# EAGLE board Dual_H-Bridge_Block-Panel-v10 (EAGLE 6.6.0), part 1 of 3
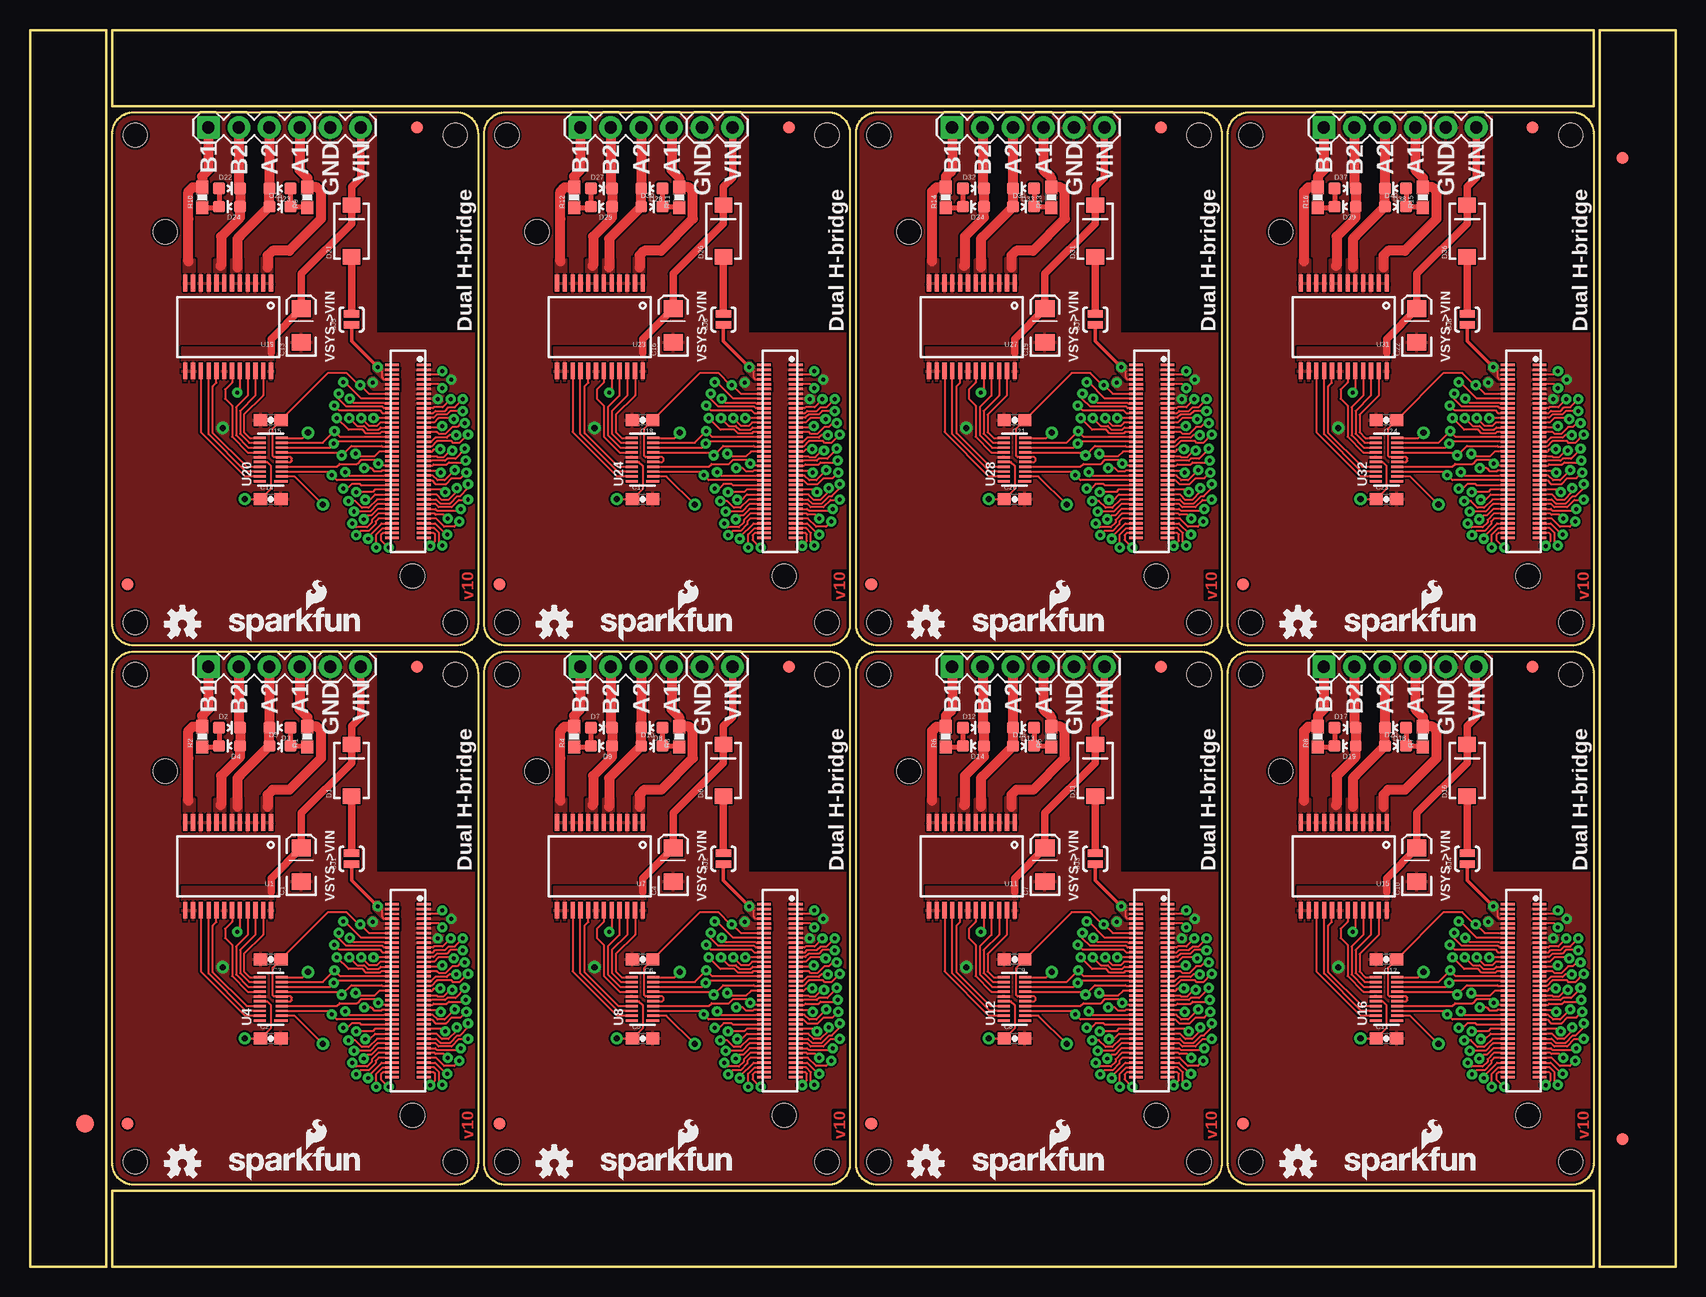
[diagram p0: board, top side]
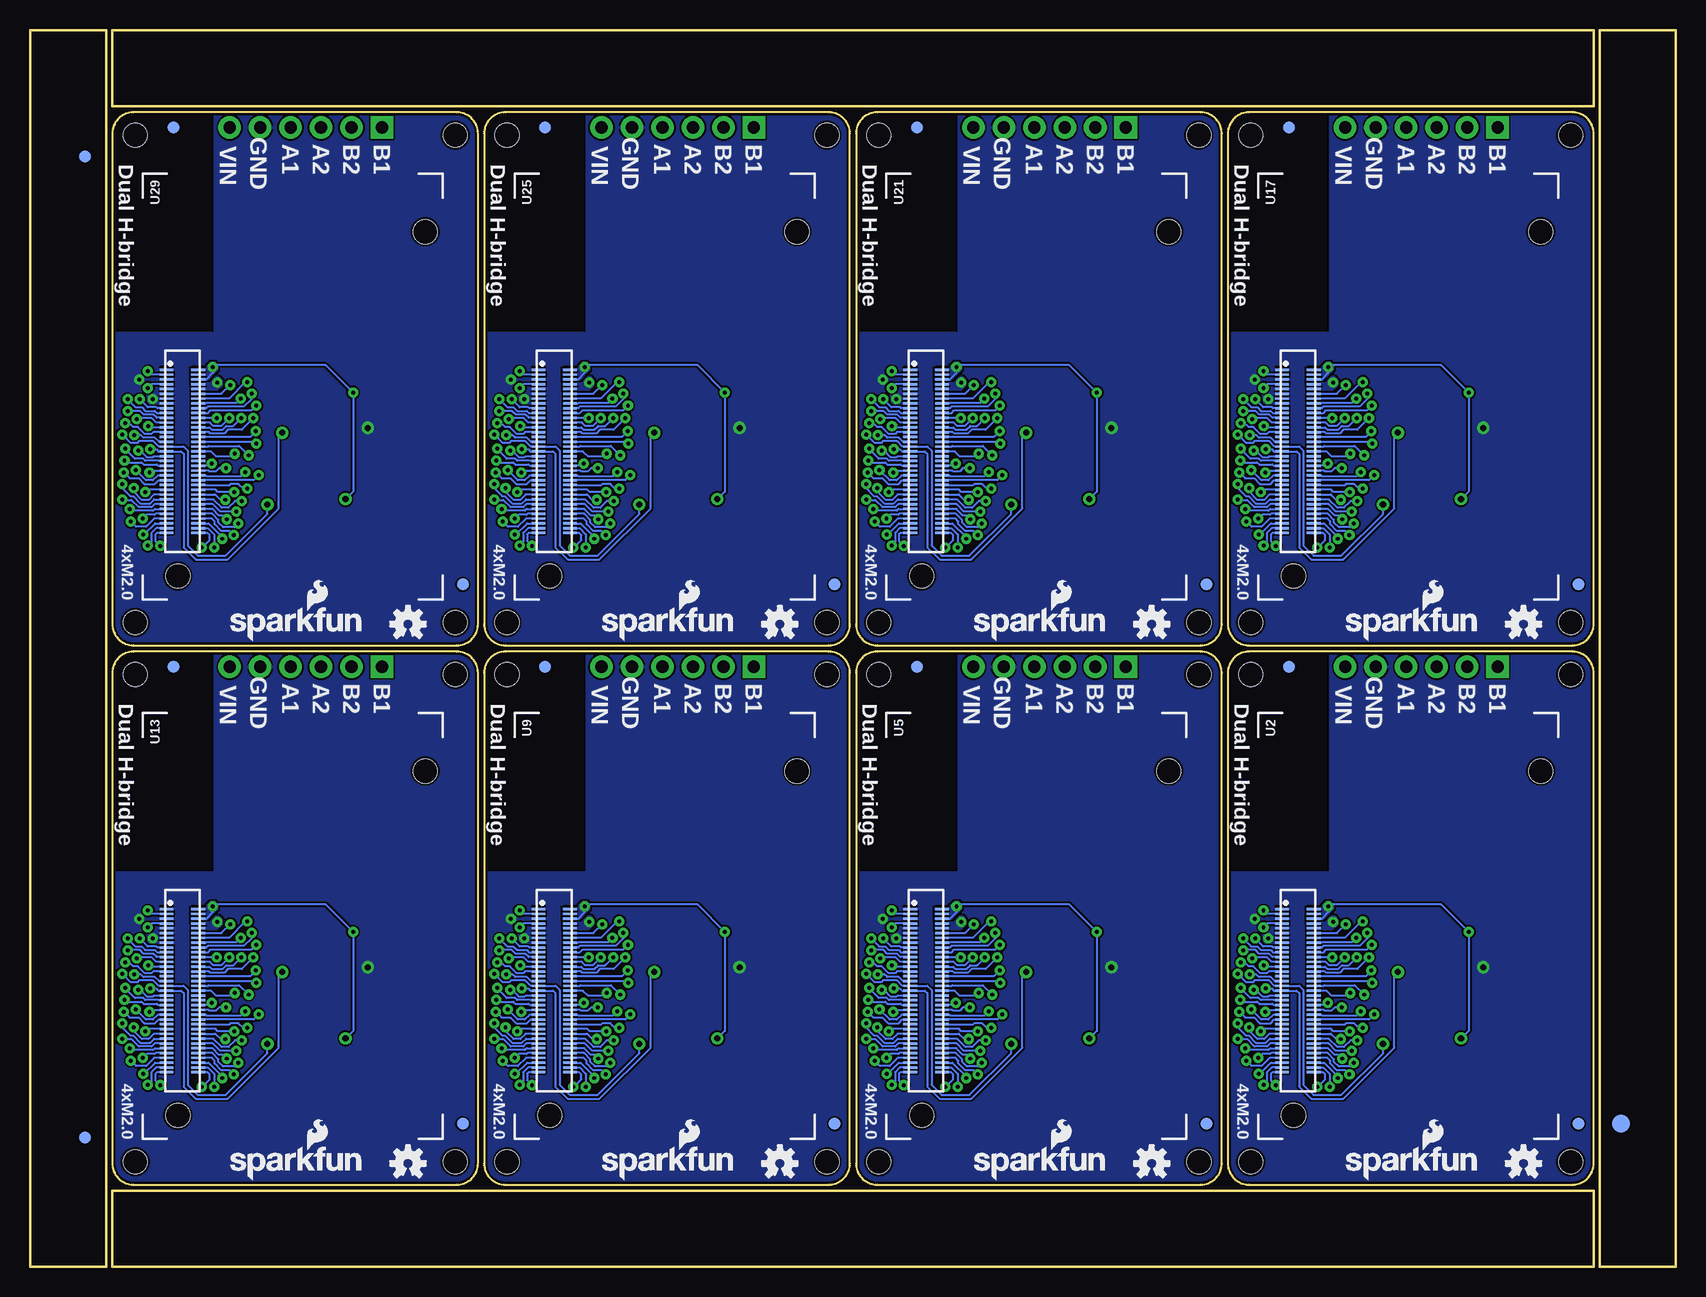
[diagram p1: board, bottom side, seen from below]

Size 137.16 x 103.12 mm. Coordinates in mm from the lower left corner, seen from the top.
Outline: 6.35,79.25 6.35,0 0,0 0,29.72
Outline: 137.16,79.25 137.16,0 130.81,0 130.81,29.72
Outline: 130.81,23.88 130.81,103.12 137.16,103.12 137.16,73.41
Outline: 0,23.88 0,103.12 6.35,103.12 6.35,73.41
Outline: 37.34,49.53 37.34,8.64 arc-90 35.56,6.86 8.64,6.86 arc-90 6.86,8.64 6.86,49.53 arc-90 8.64,51.31 35.56,51.31 arc-90 37.34,49.53
Outline: 68.33,49.53 68.33,8.64 arc-90 66.55,6.86 39.62,6.86 arc-90 37.85,8.64 37.85,49.53 arc-90 39.62,51.31 66.55,51.31 arc-90 68.33,49.53
Outline: 99.31,49.53 99.31,8.64 arc-90 97.54,6.86 70.61,6.86 arc-90 68.83,8.64 68.83,49.53 arc-90 70.61,51.31 97.54,51.31 arc-90 99.31,49.53
Outline: 130.3,49.53 130.3,8.64 arc-90 128.52,6.86 101.6,6.86 arc-90 99.82,8.64 99.82,49.53 arc-90 101.6,51.31 128.52,51.31 arc-90 130.3,49.53
Outline: 37.34,94.49 37.34,53.59 arc-90 35.56,51.82 8.64,51.82 arc-90 6.86,53.59 6.86,94.49 arc-90 8.64,96.27 35.56,96.27 arc-90 37.34,94.49
Outline: 68.33,94.49 68.33,53.59 arc-90 66.55,51.82 39.62,51.82 arc-90 37.85,53.59 37.85,94.49 arc-90 39.62,96.27 66.55,96.27 arc-90 68.33,94.49
Outline: 99.31,94.49 99.31,53.59 arc-90 97.54,51.82 70.61,51.82 arc-90 68.83,53.59 68.83,94.49 arc-90 70.61,96.27 97.54,96.27 arc-90 99.31,94.49
Outline: 130.3,94.49 130.3,53.59 arc-90 128.52,51.82 101.6,51.82 arc-90 99.82,53.59 99.82,94.49 arc-90 101.6,96.27 128.52,96.27 arc-90 130.3,94.49
Outline: 6.86,0 130.3,0 130.3,6.35 6.86,6.35 6.86,0
Outline: 130.3,103.12 6.86,103.12 6.86,96.77 130.3,96.77 130.3,103.12
Copper layers (1*16): Top 0.035mm / dielectric 1.5mm / Bottom 0.035mm
Design rules "SparkFun-2-layer *": minimum track width 6mil, minimum drill 13mil, track to track 6mil, track to pad 6mil, pad to pad 6mil, via to via 6mil, smd to smd 6mil, copper to edge 8mil, drill to drill 8mil, minimum pad ring 12mil, minimum via ring 10mil, stop-mask expansion 4mil, vias tented up to drill 20mil, thermal gap 6mil
Holes 2 mm at 35.43,8.76 8.76,8.76 8.76,49.4 35.43,49.4 66.42,8.76 39.75,8.76 39.75,49.4 66.42,49.4 97.41,8.76 70.74,8.76 70.74,49.4 97.41,49.4 128.4,8.76 101.73,8.76 101.73,49.4 128.4,49.4 35.43,53.72 8.76,53.72 8.76,94.36 35.43,94.36 66.42,53.72 39.75,53.72 39.75,94.36 66.42,94.36 97.41,53.72 70.74,53.72 70.74,94.36 97.41,94.36 128.4,53.72 101.73,53.72 101.73,94.36 128.4,94.36
tRestrict: area 29,33 to 37.3,51.3; area 59.9,33 to 68.3,51.3; area 90.9,33 to 99.3,51.3; area 121.9,33 to 130.3,51.3; area 29,78 to 37.3,96.3; area 59.9,78 to 68.3,96.3; area 90.9,78 to 99.3,96.3; area 121.9,78 to 130.3,96.3
bRestrict: area 29,33 to 37.3,51.3; area 59.9,33 to 68.3,51.3; area 90.9,33 to 99.3,51.3; area 121.9,33 to 130.3,51.3; area 29,78 to 37.3,96.3; area 59.9,78 to 68.3,96.3; area 90.9,78 to 99.3,96.3; area 121.9,78 to 130.3,96.3; 16 lines

## Footprints (pad centres in the part's own frame; a part is rotated, then mirrored left to right if it is on the bottom)
EIA3216 = smd 1.4 x 1.6: A 1.4,0; C -1.4,0
0603-CAP = smd 1.1 x 1: 1 -0.85,0; 2 0.85,0
SMA-DIODE = smd 1.27 x 1.47: A -2.15,0; C 2.15,0
LED-0603 = smd 1 x 1: A 0,-0.877; C 0,0.877
FIDUCIAL-1.5X3 = smd 1.5 x 1.5: 1 0,0
FIDUCIAL-1X2 = smd 1 x 1: 1 0,0
1X04 = drill 1.016 pad 1.88 square: 1 0,0 | drill 1.016 pad 1.88: 2 2.54,0; 3 5.08,0; 4 7.62,0
1X02 = drill 1.016 pad 1.88: 1 0,0; 2 2.54,0
0603-RES = smd 1.1 x 1: 1 -0.85,0; 2 0.85,0
PAD-JUMPER-2-NO_YES_SILK = smd 0.635 x 1.27: 1 -0.45,0; 2 0.45,0
SSOP24 = smd 0.348 x 1.397: 1 -3.575,-3.656; 2 -2.925,-3.656; 3 -2.275,-3.656; 4 -1.625,-3.656; 5 -0.975,-3.656; 6 -0.325,-3.656; 7 0.325,-3.656; 8 0.975,-3.656; 9 1.625,-3.656; 10 2.275,-3.656; 11 2.925,-3.656; 12 3.575,-3.656; 13 3.575,3.656; 14 2.925,3.656; 15 2.275,3.656; 16 1.625,3.656; 17 0.975,3.656; 18 0.325,3.656; 19 -0.325,3.656; 20 -0.975,3.656; 21 -1.625,3.656; 22 -2.275,3.656; 23 -2.925,3.656; 24 -3.575,3.656
EDISON_DAUGHTER = smd 1.14 x 0.2: 1 1.98,19.17; 2 4.62,19.17; 3 1.98,18.77; 4 4.62,18.77; 5 1.98,18.37; 6 4.62,18.37; 7 1.98,17.97; 8 4.62,17.97; 9 1.98,17.57; 10 4.62,17.57; 11 1.98,17.17; 12 4.62,17.17; 13 1.98,16.77; 14 4.62,16.77; 15 1.98,16.37; 16 4.62,16.37; 17 1.98,15.97; 18 4.62,15.97; 19 1.98,15.57; 20 4.62,15.57; 21 1.98,15.17; 22 4.62,15.17; 23 1.98,14.77; 24 4.62,14.77; 25 1.98,14.37; 26 4.62,14.37; 27 1.98,13.97; 28 4.62,13.97; 29 1.98,13.57; 30 4.62,13.57; 31 1.98,13.17; 32 4.62,13.17; 33 1.98,12.77; 34 4.62,12.77; 35 1.98,12.37; 36 4.62,12.37; 37 1.98,11.97; 38 4.62,11.97; 39 1.98,11.57; 40 4.62,11.57; 41 1.98,11.17; 42 4.62,11.17; 43 1.98,10.77; 44 4.62,10.77; 45 1.98,10.37; 46 4.62,10.37; 47 1.98,9.97; 48 4.62,9.97; 49 1.98,9.57; 50 4.62,9.57; 51 1.98,9.17; 52 4.62,9.17; 53 1.98,8.77; 54 4.62,8.77; 55 1.98,8.37; 56 4.62,8.37; 57 1.98,7.97; 58 4.62,7.97; 59 1.98,7.57; 60 4.62,7.57; 61 1.98,7.17; 62 4.62,7.17; 63 1.98,6.77; 64 4.62,6.77; 65 1.98,6.37; 66 4.62,6.37; 67 1.98,5.97; 68 4.62,5.97; 69 1.98,5.57; 70 4.62,5.57 | hole 2: 23.53,30.67; 2.93,1.98
DF40C-70DP-0.4(51) = smd 0.2 x 1.14 bottom: 1 6.8,1.32; 2 6.8,-1.32; 3 6.4,1.32; 4 6.4,-1.32; 5 6,1.32; 6 6,-1.32; 7 5.6,1.32; 8 5.6,-1.32; 9 5.2,1.32; 10 5.2,-1.32; 11 4.8,1.32; 12 4.8,-1.32; 13 4.4,1.32; 14 4.4,-1.32; 15 4,1.32; 16 4,-1.32; 17 3.6,1.32; 18 3.6,-1.32; 19 3.2,1.32; 20 3.2,-1.32; 21 2.8,1.32; 22 2.8,-1.32; 23 2.4,1.32; 24 2.4,-1.32; 25 2,1.32; 26 2,-1.32; 27 1.6,1.32; 28 1.6,-1.32; 29 1.2,1.32; 30 1.2,-1.32; 31 0.8,1.32; 32 0.8,-1.32; 33 0.4,1.32; 34 0.4,-1.32; 35 0,1.32; 36 0,-1.32; 37 -0.4,1.32; 38 -0.4,-1.32; 39 -0.8,1.32; 40 -0.8,-1.32; 41 -1.2,1.32; 42 -1.2,-1.32; 43 -1.6,1.32; 44 -1.6,-1.32; 45 -2,1.32; 46 -2,-1.32; 47 -2.4,1.32; 48 -2.4,-1.32; 49 -2.8,1.32; 50 -2.8,-1.32; 51 -3.2,1.32; 52 -3.2,-1.32; 53 -3.6,1.32; 54 -3.6,-1.32; 55 -4,1.32; 56 -4,-1.32; 57 -4.4,1.32; 58 -4.4,-1.32; 59 -4.8,1.32; 60 -4.8,-1.32; 61 -5.2,1.32; 62 -5.2,-1.32; 63 -5.6,1.32; 64 -5.6,-1.32; 65 -6,1.32; 66 -6,-1.32; 67 -6.4,1.32; 68 -6.4,-1.32; 69 -6.8,1.32; 70 -6.8,-1.32; NC1 7.2,1.32; NC2 7.2,-1.32; NC3 -7.2,-1.32; NC4 -7.2,1.32
UFDFN-20 = smd 0.2 x 1.1: 1 -1.8,-0.85 | smd 0.2 x 1: 2 -1.4,-0.9; 3 -1,-0.9; 4 -0.6,-0.9; 5 -0.2,-0.9; 6 0.2,-0.9; 7 0.6,-0.9; 8 1,-0.9; 9 1.4,-0.9; 10 1.8,-0.9; 11 1.8,0.9; 12 1.4,0.9; 13 1,0.9; 14 0.6,0.9; 15 0.2,0.9; 16 -0.2,0.9; 17 -0.6,0.9; 18 -1,0.9; 19 -1.4,0.9; 20 -1.8,0.9

## Placement (x,y rotation side)
C1  10uF  [EIA3216]  22.61,33.53 90 top
C2  0.1uF  [0603-CAP]  20.07,19.05 0 top
C3  0.1uF  [0603-CAP]  20.07,25.65 180 top
C4  10uF  [EIA3216]  53.59,33.53 90 top
C5  0.1uF  [0603-CAP]  51.05,19.05 0 top
C6  0.1uF  [0603-CAP]  51.05,25.65 180 top
C7  10uF  [EIA3216]  84.58,33.53 90 top
C8  0.1uF  [0603-CAP]  82.04,19.05 0 top
C9  0.1uF  [0603-CAP]  82.04,25.65 180 top
C10  10uF  [EIA3216]  115.57,33.53 90 top
C11  0.1uF  [0603-CAP]  113.03,19.05 0 top
C12  0.1uF  [0603-CAP]  113.03,25.65 180 top
C13  10uF  [EIA3216]  22.61,78.49 90 top
C14  0.1uF  [0603-CAP]  20.07,64.01 0 top
C15  0.1uF  [0603-CAP]  20.07,70.61 180 top
C16  10uF  [EIA3216]  53.59,78.49 90 top
C17  0.1uF  [0603-CAP]  51.05,64.01 0 top
C18  0.1uF  [0603-CAP]  51.05,70.61 180 top
C19  10uF  [EIA3216]  84.58,78.49 90 top
C20  0.1uF  [0603-CAP]  82.04,64.01 0 top
C21  0.1uF  [0603-CAP]  82.04,70.61 180 top
C22  10uF  [EIA3216]  115.57,78.49 90 top
C23  0.1uF  [0603-CAP]  113.03,64.01 0 top
C24  0.1uF  [0603-CAP]  113.03,70.61 180 top
D1  MBRA140  [SMA-DIODE]  26.8,41.4 90 top
D2  GREEN  [LED-0603]  16.64,44.96 270 top
D3  GREEN  [LED-0603]  20.83,44.96 90 top
D4  RED  [LED-0603]  16.64,43.43 90 top
D5  RED  [LED-0603]  20.83,43.43 270 top
D6  MBRA140  [SMA-DIODE]  57.78,41.4 90 top
D7  GREEN  [LED-0603]  47.62,44.96 270 top
D8  GREEN  [LED-0603]  51.82,44.96 90 top
D9  RED  [LED-0603]  47.62,43.43 90 top
D10  RED  [LED-0603]  51.82,43.43 270 top
D11  MBRA140  [SMA-DIODE]  88.77,41.4 90 top
D12  GREEN  [LED-0603]  78.61,44.96 270 top
D13  GREEN  [LED-0603]  82.8,44.96 90 top
D14  RED  [LED-0603]  78.61,43.43 90 top
D15  RED  [LED-0603]  82.8,43.43 270 top
D16  MBRA140  [SMA-DIODE]  119.76,41.4 90 top
D17  GREEN  [LED-0603]  109.6,44.96 270 top
D18  GREEN  [LED-0603]  113.79,44.96 90 top
D19  RED  [LED-0603]  109.6,43.43 90 top
D20  RED  [LED-0603]  113.79,43.43 270 top
D21  MBRA140  [SMA-DIODE]  26.8,86.36 90 top
D22  GREEN  [LED-0603]  16.64,89.92 270 top
D23  GREEN  [LED-0603]  20.83,89.92 90 top
D24  RED  [LED-0603]  16.64,88.39 90 top
D25  RED  [LED-0603]  20.83,88.39 270 top
D26  MBRA140  [SMA-DIODE]  57.78,86.36 90 top
D27  GREEN  [LED-0603]  47.62,89.92 270 top
D28  GREEN  [LED-0603]  51.82,89.92 90 top
D29  RED  [LED-0603]  47.62,88.39 90 top
D30  RED  [LED-0603]  51.82,88.39 270 top
D31  MBRA140  [SMA-DIODE]  88.77,86.36 90 top
D32  GREEN  [LED-0603]  78.61,89.92 270 top
D33  GREEN  [LED-0603]  82.8,89.92 90 top
D34  RED  [LED-0603]  78.61,88.39 90 top
D35  RED  [LED-0603]  82.8,88.39 270 top
D36  MBRA140  [SMA-DIODE]  119.76,86.36 90 top
D37  GREEN  [LED-0603]  109.6,89.92 270 top
D38  GREEN  [LED-0603]  113.79,89.92 90 top
D39  RED  [LED-0603]  109.6,88.39 90 top
D40  RED  [LED-0603]  113.79,88.39 270 top
E$1  [FIDUCIAL-1.5X3]  4.57,11.94 0 top
E$2  [FIDUCIAL-1.5X3]  4.57,11.94 0 bottom
E$3  [FIDUCIAL-1X2]  132.59,10.79 90 bottom
E$4  [FIDUCIAL-1X2]  132.72,10.67 0 top
E$5  [FIDUCIAL-1X2]  132.72,92.46 180 top
E$6  [FIDUCIAL-1X2]  132.59,92.58 90 bottom
FID1  FIDUCIAL1X2  [FIDUCIAL-1X2]  8.13,11.94 0 top
FID2  FIDUCIAL1X2  [FIDUCIAL-1X2]  32.26,50.04 0 top
FID3  FIDUCIAL1X2  [FIDUCIAL-1X2]  8.13,11.94 0 bottom
FID4  FIDUCIAL1X2  [FIDUCIAL-1X2]  32.26,50.04 0 bottom
FID5  FIDUCIAL1X2  [FIDUCIAL-1X2]  39.12,11.94 0 top
FID6  FIDUCIAL1X2  [FIDUCIAL-1X2]  63.25,50.04 0 top
FID7  FIDUCIAL1X2  [FIDUCIAL-1X2]  39.12,11.94 0 bottom
FID8  FIDUCIAL1X2  [FIDUCIAL-1X2]  63.25,50.04 0 bottom
FID9  FIDUCIAL1X2  [FIDUCIAL-1X2]  70.1,11.94 0 top
FID10  FIDUCIAL1X2  [FIDUCIAL-1X2]  94.23,50.04 0 top
FID11  FIDUCIAL1X2  [FIDUCIAL-1X2]  70.1,11.94 0 bottom
FID12  FIDUCIAL1X2  [FIDUCIAL-1X2]  94.23,50.04 0 bottom
FID13  FIDUCIAL1X2  [FIDUCIAL-1X2]  101.09,11.94 0 top
FID14  FIDUCIAL1X2  [FIDUCIAL-1X2]  125.22,50.04 0 top
FID15  FIDUCIAL1X2  [FIDUCIAL-1X2]  101.09,11.94 0 bottom
FID16  FIDUCIAL1X2  [FIDUCIAL-1X2]  125.22,50.04 0 bottom
FID17  FIDUCIAL1X2  [FIDUCIAL-1X2]  8.13,56.9 0 top
FID18  FIDUCIAL1X2  [FIDUCIAL-1X2]  32.26,95 0 top
FID19  FIDUCIAL1X2  [FIDUCIAL-1X2]  8.13,56.9 0 bottom
FID20  FIDUCIAL1X2  [FIDUCIAL-1X2]  32.26,95 0 bottom
FID21  FIDUCIAL1X2  [FIDUCIAL-1X2]  39.12,56.9 0 top
FID22  FIDUCIAL1X2  [FIDUCIAL-1X2]  63.25,95 0 top
FID23  FIDUCIAL1X2  [FIDUCIAL-1X2]  39.12,56.9 0 bottom
FID24  FIDUCIAL1X2  [FIDUCIAL-1X2]  63.25,95 0 bottom
FID25  FIDUCIAL1X2  [FIDUCIAL-1X2]  70.1,56.9 0 top
FID26  FIDUCIAL1X2  [FIDUCIAL-1X2]  94.23,95 0 top
FID27  FIDUCIAL1X2  [FIDUCIAL-1X2]  70.1,56.9 0 bottom
FID28  FIDUCIAL1X2  [FIDUCIAL-1X2]  94.23,95 0 bottom
FID29  FIDUCIAL1X2  [FIDUCIAL-1X2]  101.09,56.9 0 top
FID30  FIDUCIAL1X2  [FIDUCIAL-1X2]  125.22,95 0 top
FID31  FIDUCIAL1X2  [FIDUCIAL-1X2]  101.09,56.9 0 bottom
FID32  FIDUCIAL1X2  [FIDUCIAL-1X2]  125.22,95 0 bottom
JP1  [1X04]  14.86,50.04 0 top
JP2  M02PTH  [1X02]  25.02,50.04 0 top
JP3  [1X04]  45.85,50.04 0 top
JP4  M02PTH  [1X02]  56.01,50.04 0 top
JP5  [1X04]  76.83,50.04 0 top
JP6  M02PTH  [1X02]  87,50.04 0 top
JP7  [1X04]  107.82,50.04 0 top
JP8  M02PTH  [1X02]  117.98,50.04 0 top
JP9  [1X04]  14.86,95 0 top
JP10  M02PTH  [1X02]  25.02,95 0 top
JP11  [1X04]  45.85,95 0 top
JP12  M02PTH  [1X02]  56.01,95 0 top
JP13  [1X04]  76.83,95 0 top
JP14  M02PTH  [1X02]  87,95 0 top
JP15  [1X04]  107.82,95 0 top
JP16  M02PTH  [1X02]  117.98,95 0 top
LOGO1  OSHW-LOGOS  [OSHW-LOGO-S]  12.7,8.64 0 top
LOGO2  OSHW-LOGOS  [OSHW-LOGO-S]  12.7,8.64 0 bottom
LOGO3  SFE_LOGO_NAME_FLAME.1_INCH  [SFE_LOGO_NAME_FLAME_.1]  27.94,7.11 0 bottom
LOGO4  SFE_LOGO_NAME_FLAME.1_INCH  [SFE_LOGO_NAME_FLAME_.1]  16.15,7.11 0 top
LOGO5  OSHW-LOGOS  [OSHW-LOGO-S]  43.69,8.64 0 bottom
LOGO6  SFE_LOGO_NAME_FLAME.1_INCH  [SFE_LOGO_NAME_FLAME_.1]  58.93,7.11 0 bottom
LOGO7  OSHW-LOGOS  [OSHW-LOGO-S]  43.69,8.64 0 top
LOGO8  SFE_LOGO_NAME_FLAME.1_INCH  [SFE_LOGO_NAME_FLAME_.1]  47.14,7.11 0 top
LOGO9  OSHW-LOGOS  [OSHW-LOGO-S]  74.68,8.64 0 bottom
LOGO10  SFE_LOGO_NAME_FLAME.1_INCH  [SFE_LOGO_NAME_FLAME_.1]  89.92,7.11 0 bottom
LOGO11  OSHW-LOGOS  [OSHW-LOGO-S]  74.68,8.64 0 top
LOGO12  SFE_LOGO_NAME_FLAME.1_INCH  [SFE_LOGO_NAME_FLAME_.1]  78.13,7.11 0 top
LOGO13  OSHW-LOGOS  [OSHW-LOGO-S]  105.66,8.64 0 bottom
LOGO14  SFE_LOGO_NAME_FLAME.1_INCH  [SFE_LOGO_NAME_FLAME_.1]  120.9,7.11 0 bottom
LOGO15  OSHW-LOGOS  [OSHW-LOGO-S]  105.66,8.64 0 top
LOGO16  SFE_LOGO_NAME_FLAME.1_INCH  [SFE_LOGO_NAME_FLAME_.1]  109.12,7.11 0 top
LOGO17  OSHW-LOGOS  [OSHW-LOGO-S]  12.7,53.59 0 bottom
LOGO18  SFE_LOGO_NAME_FLAME.1_INCH  [SFE_LOGO_NAME_FLAME_.1]  27.94,52.07 0 bottom
LOGO19  OSHW-LOGOS  [OSHW-LOGO-S]  12.7,53.59 0 top
LOGO20  SFE_LOGO_NAME_FLAME.1_INCH  [SFE_LOGO_NAME_FLAME_.1]  16.15,52.07 0 top
LOGO21  OSHW-LOGOS  [OSHW-LOGO-S]  43.69,53.59 0 bottom
LOGO22  SFE_LOGO_NAME_FLAME.1_INCH  [SFE_LOGO_NAME_FLAME_.1]  58.93,52.07 0 bottom
LOGO23  OSHW-LOGOS  [OSHW-LOGO-S]  43.69,53.59 0 top
LOGO24  SFE_LOGO_NAME_FLAME.1_INCH  [SFE_LOGO_NAME_FLAME_.1]  47.14,52.07 0 top
LOGO25  OSHW-LOGOS  [OSHW-LOGO-S]  74.68,53.59 0 bottom
LOGO26  SFE_LOGO_NAME_FLAME.1_INCH  [SFE_LOGO_NAME_FLAME_.1]  89.92,52.07 0 bottom
LOGO27  OSHW-LOGOS  [OSHW-LOGO-S]  74.68,53.59 0 top
LOGO28  SFE_LOGO_NAME_FLAME.1_INCH  [SFE_LOGO_NAME_FLAME_.1]  78.13,52.07 0 top
LOGO29  OSHW-LOGOS  [OSHW-LOGO-S]  105.66,53.59 0 bottom
LOGO30  SFE_LOGO_NAME_FLAME.1_INCH  [SFE_LOGO_NAME_FLAME_.1]  120.9,52.07 0 bottom
LOGO31  OSHW-LOGOS  [OSHW-LOGO-S]  105.66,53.59 0 top
LOGO32  SFE_LOGO_NAME_FLAME.1_INCH  [SFE_LOGO_NAME_FLAME_.1]  109.12,52.07 0 top
R1  680  [0603-RES]  23.11,44.2 90 top
R2  680  [0603-RES]  14.35,44.2 90 top
R3  680  [0603-RES]  54.1,44.2 90 top
R4  680  [0603-RES]  45.34,44.2 90 top
R5  680  [0603-RES]  85.09,44.2 90 top
R6  680  [0603-RES]  76.33,44.2 90 top
R7  680  [0603-RES]  116.08,44.2 90 top
R8  680  [0603-RES]  107.31,44.2 90 top
R9  680  [0603-RES]  23.11,89.15 90 top
R10  680  [0603-RES]  14.35,89.15 90 top
R11  680  [0603-RES]  54.1,89.15 90 top
R12  680  [0603-RES]  45.34,89.15 90 top
R13  680  [0603-RES]  85.09,89.15 90 top
R14  680  [0603-RES]  76.33,89.15 90 top
R15  680  [0603-RES]  116.08,89.15 90 top
R16  680  [0603-RES]  107.31,89.15 90 top
SJ1  VSYS ENABLE  [PAD-JUMPER-2-NO_YES_SILK]  26.8,34.04 90 top
SJ2  VSYS ENABLE  [PAD-JUMPER-2-NO_YES_SILK]  57.78,34.04 90 top
SJ3  VSYS ENABLE  [PAD-JUMPER-2-NO_YES_SILK]  88.77,34.04 90 top
SJ4  VSYS ENABLE  [PAD-JUMPER-2-NO_YES_SILK]  119.76,34.04 90 top
SJ5  VSYS ENABLE  [PAD-JUMPER-2-NO_YES_SILK]  26.8,78.99 90 top
SJ6  VSYS ENABLE  [PAD-JUMPER-2-NO_YES_SILK]  57.78,78.99 90 top
SJ7  VSYS ENABLE  [PAD-JUMPER-2-NO_YES_SILK]  88.77,78.99 90 top
SJ8  VSYS ENABLE  [PAD-JUMPER-2-NO_YES_SILK]  119.76,78.99 90 top
U1  TB6612FNG  [SSOP24]  16.51,33.4 180 top
U2  EDISON_CONNECTOR_FULLMOUNTING_HOLES  [EDISON_DAUGHTER]  34.8,10.67 0 bottom
U3  EDISON_CONNECTOR_FULLHEADER  [DF40C-70DP-0.4(51)]  31.5,23.04 90 bottom
U4  TXB0108  [UFDFN-20]  20.07,22.35 90 top
U5  EDISON_CONNECTOR_FULLMOUNTING_HOLES  [EDISON_DAUGHTER]  65.79,10.67 0 bottom
U6  EDISON_CONNECTOR_FULLHEADER  [DF40C-70DP-0.4(51)]  62.49,23.04 90 bottom
U7  TB6612FNG  [SSOP24]  47.5,33.4 180 top
U8  TXB0108  [UFDFN-20]  51.05,22.35 90 top
U9  EDISON_CONNECTOR_FULLMOUNTING_HOLES  [EDISON_DAUGHTER]  96.77,10.67 0 bottom
U10  EDISON_CONNECTOR_FULLHEADER  [DF40C-70DP-0.4(51)]  93.47,23.04 90 bottom
U11  TB6612FNG  [SSOP24]  78.49,33.4 180 top
U12  TXB0108  [UFDFN-20]  82.04,22.35 90 top
U13  EDISON_CONNECTOR_FULLMOUNTING_HOLES  [EDISON_DAUGHTER]  127.76,10.67 0 bottom
U14  EDISON_CONNECTOR_FULLHEADER  [DF40C-70DP-0.4(51)]  124.46,23.04 90 bottom
U15  TB6612FNG  [SSOP24]  109.47,33.4 180 top
U16  TXB0108  [UFDFN-20]  113.03,22.35 90 top
U17  EDISON_CONNECTOR_FULLMOUNTING_HOLES  [EDISON_DAUGHTER]  34.8,55.63 0 bottom
U18  EDISON_CONNECTOR_FULLHEADER  [DF40C-70DP-0.4(51)]  31.5,68 90 bottom
U19  TB6612FNG  [SSOP24]  16.51,78.36 180 top
U20  TXB0108  [UFDFN-20]  20.07,67.31 90 top
U21  EDISON_CONNECTOR_FULLMOUNTING_HOLES  [EDISON_DAUGHTER]  65.79,55.63 0 bottom
U22  EDISON_CONNECTOR_FULLHEADER  [DF40C-70DP-0.4(51)]  62.49,68 90 bottom
U23  TB6612FNG  [SSOP24]  47.5,78.36 180 top
U24  TXB0108  [UFDFN-20]  51.05,67.31 90 top
U25  EDISON_CONNECTOR_FULLMOUNTING_HOLES  [EDISON_DAUGHTER]  96.77,55.63 0 bottom
U26  EDISON_CONNECTOR_FULLHEADER  [DF40C-70DP-0.4(51)]  93.47,68 90 bottom
U27  TB6612FNG  [SSOP24]  78.49,78.36 180 top
U28  TXB0108  [UFDFN-20]  82.04,67.31 90 top
U29  EDISON_CONNECTOR_FULLMOUNTING_HOLES  [EDISON_DAUGHTER]  127.76,55.63 0 bottom
U30  EDISON_CONNECTOR_FULLHEADER  [DF40C-70DP-0.4(51)]  124.46,68 90 bottom
U31  TB6612FNG  [SSOP24]  109.47,78.36 180 top
U32  TXB0108  [UFDFN-20]  113.03,67.31 90 top

## Library data of the parts
C1 C4 C7 C10 C13 C16 C19 C22 = SparkFun-Capacitors; PROD_ID: CAP-00811
C2 C3 C5 C6 C8 C9 C11 C12 C14 C15 C17 C18 C20 C21 C23 C24 = SparkFun-Capacitors; PROD_ID: CAP-00810
D1 D6 D11 D16 D21 D26 D31 D36 = SparkFun-DiscreteSemi; PROD_ID: DIO-08053
D2 D3 D7 D8 D12 D13 D17 D18 D22 D23 D27 D28 D32 D33 D37 D38 = SparkFun-LED; PROD_ID: DIO-00821
D4 D5 D9 D10 D14 D15 D19 D20 D24 D25 D29 D30 D34 D35 D39 D40 = SparkFun-LED; PROD_ID: DIO-00819
E$1 E$2 = SparkFun-Retired
E$3-E$6 FID1-FID32 LOGO1-LOGO32 = SparkFun-Aesthetics
JP1-JP16 = SparkFun-Connectors
R1-R16 = SparkFun-Resistors; PROD_ID: RES-09333
SJ1-SJ8 = SparkFun-Passives
U1 U7 U11 U15 U19 U23 U27 U31 = SparkFun-PowerIC; PROD_ID: IC-09363
U2 U3 U5 U6 U9 U10 U13 U14 U17 U18 U21 U22 U25 U26 U29 U30 = Edison
U4 U8 U12 U16 U20 U24 U28 U32 = Testing; PROD_ID: IC-12292

## Nets
1.8V: C3.1 U2.12 U3.12 U4.5 U4.6
1.8V1: C6.1 U5.12 U6.12 U8.5 U8.6
1.8V2: C9.1 U9.12 U10.12 U12.5 U12.6
1.8V3: C12.1 U13.12 U14.12 U16.5 U16.6
1.8V4: C15.1 U17.12 U18.12 U20.5 U20.6
1.8V5: C18.1 U21.12 U22.12 U24.5 U24.6
1.8V6: C21.1 U25.12 U26.12 U28.5 U28.6
1.8V7: C24.1 U29.12 U30.12 U32.5 U32.6
3.3V: U2.8 U2.10 U3.8 U3.10
3.3V1: U5.8 U5.10 U6.8 U6.10
3.3V2: U9.8 U9.10 U10.8 U10.10
3.3V3: U13.8 U13.10 U14.8 U14.10
3.3V4: U17.8 U17.10 U18.8 U18.10
3.3V5: U21.8 U21.10 U22.8 U22.10
3.3V6: U25.8 U25.10 U26.8 U26.10
3.3V7: U29.8 U29.10 U30.8 U30.10
A1: JP1.4 R1.2 U1.1 U1.2
A2: D3.C D5.A JP1.3 U1.5 U1.6
A3: D8.C D10.A JP3.3 U7.5 U7.6
A4: JP3.4 R3.2 U7.1 U7.2
A5: D13.C D15.A JP5.3 U11.5 U11.6
A6: JP5.4 R5.2 U11.1 U11.2
A7: D18.C D20.A JP7.3 U15.5 U15.6
A8: JP7.4 R7.2 U15.1 U15.2
A9: D23.C D25.A JP9.3 U19.5 U19.6
A10: JP9.4 R9.2 U19.1 U19.2
A11: D28.C D30.A JP11.3 U23.5 U23.6
A12: JP11.4 R11.2 U23.1 U23.2
A13: D33.C D35.A JP13.3 U27.5 U27.6
A14: JP13.4 R13.2 U27.1 U27.2
A15: D38.C D40.A JP15.3 U31.5 U31.6
A16: JP15.4 R15.2 U31.1 U31.2
B1: JP1.1 R2.2 U1.11 U1.12
B2: D2.C D4.A JP1.2 U1.7 U1.8
B3: JP3.1 R4.2 U7.11 U7.12
B4: D7.C D9.A JP3.2 U7.7 U7.8
B5: JP5.1 R6.2 U11.11 U11.12
B6: D12.C D14.A JP5.2 U11.7 U11.8
B7: JP7.1 R8.2 U15.11 U15.12
B8: D17.C D19.A JP7.2 U15.7 U15.8
B9: JP9.1 R10.2 U19.11 U19.12
B10: D22.C D24.A JP9.2 U19.7 U19.8
B11: JP11.1 R12.2 U23.11 U23.12
B12: D27.C D29.A JP11.2 U23.7 U23.8
B13: JP13.1 R14.2 U27.11 U27.12
B14: D32.C D34.A JP13.2 U27.7 U27.8
B15: JP15.1 R16.2 U31.11 U31.12
B16: D37.C D39.A JP15.2 U31.7 U31.8
DCIN: U2.14 U3.14
DCIN1: U5.14 U6.14
DCIN2: U9.14 U10.14
DCIN3: U13.14 U14.14
DCIN4: U17.14 U18.14
DCIN5: U21.14 U22.14
DCIN6: U25.14 U26.14
DCIN7: U29.14 U30.14
FAULT: U2.19 U3.19
FAULT1: U5.19 U6.19
FAULT2: U9.19 U10.19
FAULT3: U13.19 U14.19
FAULT4: U17.19 U18.19
FAULT5: U21.19 U22.19
FAULT6: U25.19 U26.19
FAULT7: U29.19 U30.19
FW_RCVR: U2.69 U3.69
FW_RCVR1: U5.69 U6.69
FW_RCVR2: U9.69 U10.69
FW_RCVR3: U13.69 U14.69
FW_RCVR4: U17.69 U18.69
FW_RCVR5: U21.69 U22.69
FW_RCVR6: U25.69 U26.69
FW_RCVR7: U29.69 U30.69
GND: C1.C C2.2 C3.2 JP2.1 U1.3 U1.4 U1.9 U1.10 U1.18 U2.1 U2.5 U2.9 U2.11 U2.13 U2.15 U3.1 U3.5 U3.9 U3.11 U3.13 U3.15 U4.15
GND1: C4.C C5.2 C6.2 JP4.1 U5.1 U5.5 U5.9 U5.11 U5.13 U5.15 U6.1 U6.5 U6.9 U6.11 U6.13 U6.15 U7.3 U7.4 U7.9 U7.10 U7.18 U8.15
GND2: C7.C C8.2 C9.2 JP6.1 U9.1 U9.5 U9.9 U9.11 U9.13 U9.15 U10.1 U10.5 U10.9 U10.11 U10.13 U10.15 U11.3 U11.4 U11.9 U11.10 U11.18 U12.15
GND3: C10.C C11.2 C12.2 JP8.1 U13.1 U13.5 U13.9 U13.11 U13.13 U13.15 U14.1 U14.5 U14.9 U14.11 U14.13 U14.15 U15.3 U15.4 U15.9 U15.10 U15.18 U16.15
GND4: C13.C C14.2 C15.2 JP10.1 U17.1 U17.5 U17.9 U17.11 U17.13 U17.15 U18.1 U18.5 U18.9 U18.11 U18.13 U18.15 U19.3 U19.4 U19.9 U19.10 U19.18 U20.15
GND5: C16.C C17.2 C18.2 JP12.1 U21.1 U21.5 U21.9 U21.11 U21.13 U21.15 U22.1 U22.5 U22.9 U22.11 U22.13 U22.15 U23.3 U23.4 U23.9 U23.10 U23.18 U24.15
GND6: C19.C C20.2 C21.2 JP14.1 U25.1 U25.5 U25.9 U25.11 U25.13 U25.15 U26.1 U26.5 U26.9 U26.11 U26.13 U26.15 U27.3 U27.4 U27.9 U27.10 U27.18 U28.15
GND7: C22.C C23.2 C24.2 JP16.1 U29.1 U29.5 U29.9 U29.11 U29.13 U29.15 U30.1 U30.5 U30.9 U30.11 U30.13 U30.15 U31.3 U31.4 U31.9 U31.10 U31.18 U32.15
GP1: U5.48 U6.48 U8.3
GP2: U5.42 U6.42 U8.4
GP3: U5.34 U6.34 U8.7
GP4: U5.32 U6.32 U8.8
GP5: U5.30 U6.30 U8.9
GP6: U5.28 U6.28
GP7: U5.26 U6.26
GP8: U5.25 U6.25
GP9: U5.24 U6.24
GP10: U9.48 U10.48 U12.3
GP11: U9.42 U10.42 U12.4
GP12: U9.34 U10.34 U12.7
GP12_PWM0: U2.35 U3.35 U4.10
GP12_PWM1: U5.35 U6.35 U8.10
GP12_PWM2: U9.35 U10.35 U12.10
GP12_PWM3: U13.35 U14.35 U16.10
GP12_PWM4: U17.35 U18.35 U20.10
GP12_PWM5: U21.35 U22.35 U24.10
GP12_PWM6: U25.35 U26.35 U28.10
GP12_PWM7: U29.35 U30.35 U32.10
GP13: U9.32 U10.32 U12.8
GP13_PWM1: U2.33 U3.33 U4.2
GP13_PWM2: U5.33 U6.33 U8.2
GP13_PWM3: U9.33 U10.33 U12.2
GP13_PWM4: U13.33 U14.33 U16.2
GP13_PWM5: U17.33 U18.33 U20.2
GP13_PWM6: U21.33 U22.33 U24.2
GP13_PWM7: U25.33 U26.33 U28.2
GP13_PWM8: U29.33 U30.33 U32.2
GP14: U2.48 U3.48 U4.3
GP15: U2.42 U3.42 U4.4
GP16: U9.30 U10.30 U12.9
GP17: U9.28 U10.28
GP18: U9.26 U10.26
GP19: U9.25 U10.25
GP19_I2C_1_SCL: U2.41 U3.41
GP19_I2C_1_SCL1: U5.41 U6.41
GP19_I2C_1_SCL2: U9.41 U10.41
GP19_I2C_1_SCL3: U13.41 U14.41
GP19_I2C_1_SCL4: U17.41 U18.41
GP19_I2C_1_SCL5: U21.41 U22.41
GP19_I2C_1_SCL6: U25.41 U26.41
GP19_I2C_1_SCL7: U29.41 U30.41
GP20: U9.24 U10.24
GP20_I2C_1_SDA: U2.43 U3.43
GP20_I2C_1_SDA1: U5.43 U6.43
GP20_I2C_1_SDA2: U9.43 U10.43
GP20_I2C_1_SDA3: U13.43 U14.43
GP20_I2C_1_SDA4: U17.43 U18.43
GP20_I2C_1_SDA5: U21.43 U22.43
GP20_I2C_1_SDA6: U25.43 U26.43
GP20_I2C_1_SDA7: U29.43 U30.43
GP21: U13.48 U14.48 U16.3
GP22: U13.42 U14.42 U16.4
GP23: U13.34 U14.34 U16.7
GP24: U13.32 U14.32 U16.8
GP25: U13.30 U14.30 U16.9
GP26: U13.28 U14.28
GP27: U13.26 U14.26
GP27_I2C_6_SCL: U2.45 U3.45
GP27_I2C_6_SCL1: U5.45 U6.45
GP27_I2C_6_SCL2: U9.45 U10.45
GP27_I2C_6_SCL3: U13.45 U14.45
GP27_I2C_6_SCL4: U17.45 U18.45
GP27_I2C_6_SCL5: U21.45 U22.45
GP27_I2C_6_SCL6: U25.45 U26.45
GP27_I2C_6_SCL7: U29.45 U30.45
GP28: U13.25 U14.25
GP28_I2C_6_SDA: U2.47 U3.47
GP28_I2C_6_SDA1: U5.47 U6.47
GP28_I2C_6_SDA2: U9.47 U10.47
GP28_I2C_6_SDA3: U13.47 U14.47
GP28_I2C_6_SDA4: U17.47 U18.47
GP28_I2C_6_SDA5: U21.47 U22.47
GP28_I2C_6_SDA6: U25.47 U26.47
GP28_I2C_6_SDA7: U29.47 U30.47
GP29: U13.24 U14.24
GP30: U17.48 U18.48 U20.3
GP31: U17.42 U18.42 U20.4
GP32: U17.34 U18.34 U20.7
GP33: U17.32 U18.32 U20.8
GP34: U17.30 U18.30 U20.9
GP35: U17.28 U18.28
GP36: U17.26 U18.26
GP37: U17.25 U18.25
GP38: U17.24 U18.24
GP39: U21.48 U22.48 U24.3
GP40: U21.42 U22.42 U24.4
GP40_I2S_2_CLK: U2.52 U3.52
GP40_I2S_2_CLK1: U5.52 U6.52
GP40_I2S_2_CLK2: U9.52 U10.52
GP40_I2S_2_CLK3: U13.52 U14.52
GP40_I2S_2_CLK4: U17.52 U18.52
GP40_I2S_2_CLK5: U21.52 U22.52
GP40_I2S_2_CLK6: U25.52 U26.52
GP40_I2S_2_CLK7: U29.52 U30.52
GP41: U21.34 U22.34 U24.7
GP41_I2S_2_FS: U2.54 U3.54
GP41_I2S_2_FS1: U5.54 U6.54
GP41_I2S_2_FS2: U9.54 U10.54
GP41_I2S_2_FS3: U13.54 U14.54
GP41_I2S_2_FS4: U17.54 U18.54
GP41_I2S_2_FS5: U21.54 U22.54
GP41_I2S_2_FS6: U25.54 U26.54
GP41_I2S_2_FS7: U29.54 U30.54
GP42: U21.32 U22.32 U24.8
GP42_I2S_2_RXD: U2.50 U3.50
GP42_I2S_2_RXD1: U5.50 U6.50
GP42_I2S_2_RXD2: U9.50 U10.50
GP42_I2S_2_RXD3: U13.50 U14.50
GP42_I2S_2_RXD4: U17.50 U18.50
GP42_I2S_2_RXD5: U21.50 U22.50
GP42_I2S_2_RXD6: U25.50 U26.50
GP42_I2S_2_RXD7: U29.50 U30.50
GP43: U21.30 U22.30 U24.9
GP43_I2S_2_TXD: U2.56 U3.56
GP43_I2S_2_TXD1: U5.56 U6.56
GP43_I2S_2_TXD2: U9.56 U10.56
GP43_I2S_2_TXD3: U13.56 U14.56
GP43_I2S_2_TXD4: U17.56 U18.56
GP43_I2S_2_TXD5: U21.56 U22.56
GP43_I2S_2_TXD6: U25.56 U26.56
GP43_I2S_2_TXD7: U29.56 U30.56
GP44: U2.24 U3.24
GP45: U2.26 U3.26
GP46: U2.28 U3.28
GP47: U2.30 U3.30 U4.9
GP48: U2.32 U3.32 U4.8
GP49: U2.34 U3.34 U4.7
GP50: U21.28 U22.28
GP51: U21.26 U22.26
GP52: U21.25 U22.25
GP53: U21.24 U22.24
GP54: U25.48 U26.48 U28.3
GP55: U25.42 U26.42 U28.4
GP56: U25.34 U26.34 U28.7
GP57: U25.32 U26.32 U28.8
GP58: U25.30 U26.30 U28.9
GP59: U25.28 U26.28
GP60: U25.26 U26.26
GP61: U25.25 U26.25
GP62: U25.24 U26.24
GP63: U29.48 U30.48 U32.3
GP64: U29.42 U30.42 U32.4
GP65: U29.34 U30.34 U32.7
GP66: U29.32 U30.32 U32.8
GP67: U29.30 U30.30 U32.9
GP68: U29.28 U30.28
GP69: U29.26 U30.26
GP70: U29.25 U30.25
GP71: U29.24 U30.24
GP77_SD_0_CD#: U2.60 U3.60
GP77_SD_0_CD#1: U5.60 U6.60
GP77_SD_0_CD#2: U9.60 U10.60
GP77_SD_0_CD#3: U13.60 U14.60
GP77_SD_0_CD#4: U17.60 U18.60
GP77_SD_0_CD#5: U21.60 U22.60
GP77_SD_0_CD#6: U25.60 U26.60
GP77_SD_0_CD#7: U29.60 U30.60
GP78_SD_0_CLK: U2.58 U3.58
GP78_SD_0_CLK1: U5.58 U6.58
GP78_SD_0_CLK2: U9.58 U10.58
GP78_SD_0_CLK3: U13.58 U14.58
GP78_SD_0_CLK4: U17.58 U18.58
GP78_SD_0_CLK5: U21.58 U22.58
GP78_SD_0_CLK6: U25.58 U26.58
GP78_SD_0_CLK7: U29.58 U30.58
GP79_SD_0_CMD: U2.62 U3.62
GP79_SD_0_CMD1: U5.62 U6.62
GP79_SD_0_CMD2: U9.62 U10.62
GP79_SD_0_CMD3: U13.62 U14.62
GP79_SD_0_CMD4: U17.62 U18.62
GP79_SD_0_CMD5: U21.62 U22.62
GP79_SD_0_CMD6: U25.62 U26.62
GP79_SD_0_CMD7: U29.62 U30.62
GP80_SD_0_DAT0: U2.66 U3.66
GP80_SD_0_DAT1: U5.66 U6.66
GP80_SD_0_DAT2: U9.66 U10.66
GP80_SD_0_DAT3: U13.66 U14.66
GP80_SD_0_DAT4: U17.66 U18.66
GP80_SD_0_DAT5: U21.66 U22.66
GP80_SD_0_DAT6: U25.66 U26.66
GP80_SD_0_DAT7: U29.66 U30.66
GP81_SD_0_DAT1: U2.70 U3.70
GP81_SD_0_DAT2: U5.70 U6.70
GP81_SD_0_DAT3: U9.70 U10.70
GP81_SD_0_DAT4: U13.70 U14.70
GP81_SD_0_DAT5: U17.70 U18.70
GP81_SD_0_DAT6: U21.70 U22.70
GP81_SD_0_DAT7: U25.70 U26.70
GP81_SD_0_DAT8: U29.70 U30.70
GP82_SD_0_DAT1: U5.64 U6.64
GP82_SD_0_DAT2: U2.64 U3.64
GP82_SD_0_DAT3: U9.64 U10.64
GP82_SD_0_DAT4: U13.64 U14.64
GP82_SD_0_DAT5: U17.64 U18.64
GP82_SD_0_DAT6: U21.64 U22.64
GP82_SD_0_DAT7: U25.64 U26.64
GP82_SD_0_DAT8: U29.64 U30.64
GP83_SD_0_DAT1: U5.68 U6.68
GP83_SD_0_DAT2: U9.68 U10.68
GP83_SD_0_DAT3: U2.68 U3.68
GP83_SD_0_DAT4: U13.68 U14.68
GP83_SD_0_DAT5: U17.68 U18.68
GP83_SD_0_DAT6: U21.68 U22.68
GP83_SD_0_DAT7: U25.68 U26.68
GP83_SD_0_DAT8: U29.68 U30.68
GP84_SD_CLK_FB: U2.44 U3.44
GP84_SD_CLK_FB1: U5.44 U6.44
GP84_SD_CLK_FB2: U9.44 U10.44
GP84_SD_CLK_FB3: U13.44 U14.44
GP84_SD_CLK_FB4: U17.44 U18.44
GP84_SD_CLK_FB5: U21.44 U22.44
GP84_SD_CLK_FB6: U25.44 U26.44
GP84_SD_CLK_FB7: U29.44 U30.44
GP109_SPI_2_CLK: U2.55 U3.55
GP109_SPI_2_CLK1: U5.55 U6.55
GP109_SPI_2_CLK2: U9.55 U10.55
GP109_SPI_2_CLK3: U13.55 U14.55
GP109_SPI_2_CLK4: U17.55 U18.55
GP109_SPI_2_CLK5: U21.55 U22.55
GP109_SPI_2_CLK6: U25.55 U26.55
GP109_SPI_2_CLK7: U29.55 U30.55
GP110_SPI_2_FS0: U2.53 U3.53
GP110_SPI_2_FS1: U5.53 U6.53
GP110_SPI_2_FS2: U9.53 U10.53
GP110_SPI_2_FS3: U13.53 U14.53
GP110_SPI_2_FS4: U17.53 U18.53
GP110_SPI_2_FS5: U21.53 U22.53
GP110_SPI_2_FS6: U25.53 U26.53
GP110_SPI_2_FS7: U29.53 U30.53
GP111_SPI_2_FS1: U2.51 U3.51
GP111_SPI_2_FS2: U5.51 U6.51
GP111_SPI_2_FS3: U9.51 U10.51
GP111_SPI_2_FS4: U13.51 U14.51
GP111_SPI_2_FS5: U17.51 U18.51
GP111_SPI_2_FS6: U21.51 U22.51
GP111_SPI_2_FS7: U25.51 U26.51
GP111_SPI_2_FS8: U29.51 U30.51
GP114_SPI_2_RXD: U2.59 U3.59
GP114_SPI_2_RXD1: U5.59 U6.59
GP114_SPI_2_RXD2: U9.59 U10.59
GP114_SPI_2_RXD3: U13.59 U14.59
GP114_SPI_2_RXD4: U17.59 U18.59
GP114_SPI_2_RXD5: U21.59 U22.59
GP114_SPI_2_RXD6: U25.59 U26.59
GP114_SPI_2_RXD7: U29.59 U30.59
GP115_SPI_2_TXD: U2.57 U3.57
GP115_SPI_2_TXD1: U5.57 U6.57
GP115_SPI_2_TXD2: U9.57 U10.57
GP115_SPI_2_TXD3: U13.57 U14.57
GP115_SPI_2_TXD4: U17.57 U18.57
GP115_SPI_2_TXD5: U21.57 U22.57
GP115_SPI_2_TXD6: U25.57 U26.57
GP115_SPI_2_TXD7: U29.57 U30.57
GP128_UART_1_CTS: U2.65 U3.65
GP128_UART_1_CTS1: U5.65 U6.65
GP128_UART_1_CTS2: U9.65 U10.65
GP128_UART_1_CTS3: U13.65 U14.65
GP128_UART_1_CTS4: U17.65 U18.65
GP128_UART_1_CTS5: U21.65 U22.65
GP128_UART_1_CTS6: U25.65 U26.65
GP128_UART_1_CTS7: U29.65 U30.65
GP129_UART_1_RTS: U2.63 U3.63
GP129_UART_1_RTS1: U5.63 U6.63
GP129_UART_1_RTS2: U9.63 U10.63
GP129_UART_1_RTS3: U13.63 U14.63
GP129_UART_1_RTS4: U17.63 U18.63
GP129_UART_1_RTS5: U21.63 U22.63
GP129_UART_1_RTS6: U25.63 U26.63
GP129_UART_1_RTS7: U29.63 U30.63
GP130_UART_1_RX: U2.61 U3.61
GP130_UART_1_RX1: U5.61 U6.61
GP130_UART_1_RX2: U9.61 U10.61
GP130_UART_1_RX3: U13.61 U14.61
GP130_UART_1_RX4: U17.61 U18.61
GP130_UART_1_RX5: U21.61 U22.61
GP130_UART_1_RX6: U25.61 U26.61
GP130_UART_1_RX7: U29.61 U30.61
GP131_UART_1_TX: U2.46 U3.46
GP131_UART_1_TX1: U5.46 U6.46
GP131_UART_1_TX2: U9.46 U10.46
GP131_UART_1_TX3: U13.46 U14.46
GP131_UART_1_TX4: U17.46 U18.46
GP131_UART_1_TX5: U21.46 U22.46
GP131_UART_1_TX6: U25.46 U26.46
GP131_UART_1_TX7: U29.46 U30.46
GP134_UART_2_RX: U2.22 U3.22
GP134_UART_2_RX1: U5.22 U6.22
GP134_UART_2_RX2: U9.22 U10.22
GP134_UART_2_RX3: U13.22 U14.22
GP134_UART_2_RX4: U17.22 U18.22
GP134_UART_2_RX5: U21.22 U22.22
GP134_UART_2_RX6: U25.22 U26.22
GP134_UART_2_RX7: U29.22 U30.22
GP135_UART_2_TX: U2.27 U3.27
GP135_UART_2_TX1: U5.27 U6.27
GP135_UART_2_TX2: U9.27 U10.27
GP135_UART_2_TX3: U13.27 U14.27
GP135_UART_2_TX4: U17.27 U18.27
GP135_UART_2_TX5: U21.27 U22.27
GP135_UART_2_TX6: U25.27 U26.27
GP135_UART_2_TX7: U29.27 U30.27
GP165: U2.25 U3.25
GP182_PWM1: U5.37 U6.37
GP182_PWM2: U2.37 U3.37
GP182_PWM3: U9.37 U10.37
GP182_PWM4: U13.37 U14.37
GP182_PWM5: U17.37 U18.37
GP182_PWM6: U21.37 U22.37
GP182_PWM7: U25.37 U26.37
GP182_PWM8: U29.37 U30.37
GP183_PWM1: U5.39 U6.39
GP183_PWM2: U9.39 U10.39
GP183_PWM3: U2.39 U3.39
GP183_PWM4: U13.39 U14.39
GP183_PWM5: U17.39 U18.39
GP183_PWM6: U21.39 U22.39
GP183_PWM7: U25.39 U26.39
GP183_PWM8: U29.39 U30.39
MSIC_SLP_CLK: U2.7 U3.7
MSIC_SLP_CLK1: U5.7 U6.7
MSIC_SLP_CLK2: U9.7 U10.7
MSIC_SLP_CLK3: U13.7 U14.7
MSIC_SLP_CLK4: U17.7 U18.7
MSIC_SLP_CLK5: U21.7 U22.7
MSIC_SLP_CLK6: U25.7 U26.7
MSIC_SLP_CLK7: U29.7 U30.7
N$1: D1.A SJ1.2
N$2: D2.A D4.C R2.1
N$3: U1.15 U4.19
N$4: U1.23 U4.11
N$5: D3.A D5.C R1.1
N$6: U7.19 U8.14
N$7: U7.17 U8.17
N$8: U7.16 U8.18
N$9: U7.21 U8.13
N$10: U1.19 U4.14
N$11: U1.17 U4.17
N$12: U1.16 U4.18
N$13: U7.22 U8.12
N$14: U1.21 U4.13
N$15: U1.22 U4.12
N$16: U7.15 U8.19
N$17: U7.23 U8.11
N$18: D6.A SJ2.2
N$19: D7.A D9.C R4.1
N$20: D8.A D10.C R3.1
N$21: U11.19 U12.14
N$22: U11.17 U12.17
N$23: U11.16 U12.18
N$24: U11.21 U12.13
N$25: U11.22 U12.12
N$26: U11.15 U12.19
N$27: U11.23 U12.11
N$28: D11.A SJ3.2
N$29: D12.A D14.C R6.1
N$30: D13.A D15.C R5.1
N$31: U15.19 U16.14
N$32: U15.17 U16.17
N$33: U15.16 U16.18
N$34: U15.21 U16.13
N$35: U15.22 U16.12
N$36: U15.15 U16.19
N$37: U15.23 U16.11
N$38: D16.A SJ4.2
N$39: D17.A D19.C R8.1
N$40: D18.A D20.C R7.1
N$41: U19.19 U20.14
N$42: U19.17 U20.17
N$43: U19.16 U20.18
N$44: U19.21 U20.13
N$45: U19.22 U20.12
N$46: U19.15 U20.19
N$47: U19.23 U20.11
N$48: D21.A SJ5.2
N$49: D22.A D24.C R10.1
N$50: D23.A D25.C R9.1
N$51: U23.19 U24.14
N$52: U23.17 U24.17
N$53: U23.16 U24.18
N$54: U23.21 U24.13
N$55: U23.22 U24.12
N$56: U23.15 U24.19
N$57: U23.23 U24.11
N$58: D26.A SJ6.2
N$59: D27.A D29.C R12.1
N$60: D28.A D30.C R11.1
N$61: U27.19 U28.14
N$62: U27.17 U28.17
N$63: U27.16 U28.18
N$64: U27.21 U28.13
N$65: U27.22 U28.12
N$66: U27.15 U28.19
N$67: U27.23 U28.11
N$68: D31.A SJ7.2
N$69: D32.A D34.C R14.1
N$70: D33.A D35.C R13.1
N$71: U31.19 U32.14
N$72: U31.17 U32.17
N$73: U31.16 U32.18
N$74: U31.21 U32.13
N$75: U31.22 U32.12
N$76: U31.15 U32.19
N$77: U31.23 U32.11
N$78: D36.A SJ8.2
N$79: D37.A D39.C R16.1
N$80: D38.A D40.C R15.1
OSC_CLK_OUT: U2.67 U3.67
OSC_CLK_OUT1: U5.67 U6.67
OSC_CLK_OUT2: U9.67 U10.67
OSC_CLK_OUT3: U13.67 U14.67
OSC_CLK_OUT4: U17.67 U18.67
OSC_CLK_OUT5: U21.67 U22.67
OSC_CLK_OUT6: U25.67 U26.67
OSC_CLK_OUT7: U29.67 U30.67
PSW: U2.21 U3.21
PSW1: U5.21 U6.21
PSW2: U9.21 U10.21
PSW3: U13.21 U14.21
PSW4: U17.21 U18.21
PSW5: U21.21 U22.21
PSW6: U25.21 U26.21
PSW7: U29.21 U30.21
PWRBTN#: U2.17 U3.17
PWRBTN#1: U5.17 U6.17
PWRBTN#2: U9.17 U10.17
PWRBTN#3: U13.17 U14.17
PWRBTN#4: U17.17 U18.17
PWRBTN#5: U21.17 U22.17
PWRBTN#6: U25.17 U26.17
PWRBTN#7: U29.17 U30.17
RCVR_MODE: U2.31 U3.31
RCVR_MODE1: U5.31 U6.31
RCVR_MODE2: U9.31 U10.31
RCVR_MODE3: U13.31 U14.31
RCVR_MODE4: U17.31 U18.31
RCVR_MODE5: U21.31 U22.31
RCVR_MODE6: U25.31 U26.31
RCVR_MODE7: U29.31 U30.31
RESET_OUT#: U2.36 U3.36
RESET_OUT#1: U5.36 U6.36
RESET_OUT#2: U9.36 U10.36
RESET_OUT#3: U13.36 U14.36
RESET_OUT#4: U17.36 U18.36
RESET_OUT#5: U21.36 U22.36
RESET_OUT#6: U25.36 U26.36
RESET_OUT#7: U29.36 U30.36
USB_DN: U2.18 U3.18
USB_DN1: U5.18 U6.18
USB_DN2: U9.18 U10.18
USB_DN3: U13.18 U14.18
USB_DN4: U17.18 U18.18
USB_DN5: U21.18 U22.18
USB_DN6: U25.18 U26.18
USB_DN7: U29.18 U30.18
USB_DP: U2.16 U3.16
USB_DP1: U5.16 U6.16
USB_DP2: U9.16 U10.16
USB_DP3: U13.16 U14.16
USB_DP4: U17.16 U18.16
USB_DP5: U21.16 U22.16
USB_DP6: U25.16 U26.16
USB_DP7: U29.16 U30.16
USB_ID: U2.3 U3.3
USB_ID1: U5.3 U6.3
USB_ID2: U9.3 U10.3
USB_ID3: U13.3 U14.3
USB_ID4: U17.3 U18.3
USB_ID5: U21.3 U22.3
USB_ID6: U25.3 U26.3
USB_ID7: U29.3 U30.3
USB_VBUS: U2.20 U3.20
USB_VBUS1: U5.20 U6.20
USB_VBUS2: U9.20 U10.20
USB_VBUS3: U13.20 U14.20
USB_VBUS4: U17.20 U18.20
USB_VBUS5: U21.20 U22.20
USB_VBUS6: U25.20 U26.20
USB_VBUS7: U29.20 U30.20
V_BAT_BKUP: U2.23 U3.23
V_BAT_BKUP1: U5.23 U6.23
V_BAT_BKUP2: U9.23 U10.23
V_BAT_BKUP3: U13.23 U14.23
V_BAT_BKUP4: U17.23 U18.23
V_BAT_BKUP5: U21.23 U22.23
V_BAT_BKUP6: U25.23 U26.23
V_BAT_BKUP7: U29.23 U30.23
VIN: C1.A D1.C JP2.2 U1.13 U1.14 U1.24
VIN1: C4.A D6.C JP4.2 U7.13 U7.14 U7.24
VIN2: C7.A D11.C JP6.2 U11.13 U11.14 U11.24
VIN3: C10.A D16.C JP8.2 U15.13 U15.14 U15.24
VIN4: C13.A D21.C JP10.2 U19.13 U19.14 U19.24
VIN5: C16.A D26.C JP12.2 U23.13 U23.14 U23.24
VIN6: C19.A D31.C JP14.2 U27.13 U27.14 U27.24
VIN7: C22.A D36.C JP16.2 U31.13 U31.14 U31.24
VSYS: C2.1 SJ1.1 U1.20 U2.2 U2.4 U2.6 U3.2 U3.4 U3.6 U4.16
VSYS1: C5.1 SJ2.1 U5.2 U5.4 U5.6 U6.2 U6.4 U6.6 U7.20 U8.16
VSYS2: C8.1 SJ3.1 U9.2 U9.4 U9.6 U10.2 U10.4 U10.6 U11.20 U12.16
VSYS3: C11.1 SJ4.1 U13.2 U13.4 U13.6 U14.2 U14.4 U14.6 U15.20 U16.16
VSYS4: C14.1 SJ5.1 U17.2 U17.4 U17.6 U18.2 U18.4 U18.6 U19.20 U20.16
VSYS5: C17.1 SJ6.1 U21.2 U21.4 U21.6 U22.2 U22.4 U22.6 U23.20 U24.16
VSYS6: C20.1 SJ7.1 U25.2 U25.4 U25.6 U26.2 U26.4 U26.6 U27.20 U28.16
VSYS7: C23.1 SJ8.1 U29.2 U29.4 U29.6 U30.2 U30.4 U30.6 U31.20 U32.16

## Tracks (layer width: path | path; a pad name or v marks a point on that pad's centre or on a via)
1.8V  (via drill 0.33)
  Top 0.152: U3.12 28.25,27.84 v27.51,28.57 27.38,28.57 26.39,29.57 24.83,29.57 C3.1 20.22,24.96 20.22,22.66 20.32,22.55 U4.6
  Top 0.178: U4.5 21.72,22.15 21.82,22.25 21.82,22.45 21.72,22.55 U4.6
  Bottom 0.152: U3.12 28.25,27.84 v27.51,28.57
1.8V1  (via drill 0.33)
  Top 0.152: U6.12 59.23,27.84 v58.5,28.57 58.37,28.57 57.38,29.57 55.82,29.57 C6.1 51.21,24.96 51.21,22.66 51.31,22.55 U8.6
  Top 0.178: U8.5 52.71,22.15 52.81,22.25 52.81,22.45 52.7,22.55 U8.6
  Bottom 0.152: U6.12 59.23,27.84 v58.5,28.57
1.8V2  (via drill 0.33)
  Top 0.152: U10.12 90.22,27.84 v89.48,28.57 89.36,28.57 88.37,29.57 86.8,29.57 C9.1 82.19,24.96 82.19,22.66 82.3,22.55 U12.6
  Top 0.178: U12.5 83.7,22.15 83.8,22.25 83.8,22.45 83.69,22.55 U12.6
  Bottom 0.152: U10.12 90.22,27.84 v89.48,28.57
1.8V3  (via drill 0.33)
  Top 0.152: U14.12 121.21,27.84 v120.47,28.57 120.34,28.57 119.36,29.57 117.79,29.57 C12.1 113.18,24.96 113.18,22.66 113.29,22.55 U16.6
  Top 0.178: U16.5 114.68,22.15 114.78,22.25 114.78,22.45 114.68,22.55 U16.6
  Bottom 0.152: U14.12 121.21,27.84 v120.47,28.57
1.8V4  (via drill 0.33)
  Top 0.152: U18.12 28.25,72.8 v27.51,73.53 27.38,73.53 26.39,74.52 24.83,74.52 C15.1 20.22,69.91 20.22,67.61 20.32,67.51 U20.6
  Top 0.178: U20.5 21.72,67.11 21.82,67.21 21.82,67.41 21.72,67.51 U20.6
  Bottom 0.152: U18.12 28.25,72.8 v27.51,73.53
1.8V5  (via drill 0.33)
  Top 0.152: U22.12 59.23,72.8 v58.5,73.53 58.37,73.53 57.38,74.52 55.82,74.52 C18.1 51.21,69.91 51.21,67.61 51.31,67.51 U24.6
  Top 0.178: U24.5 52.71,67.11 52.81,67.21 52.81,67.41 52.7,67.51 U24.6
  Bottom 0.152: U22.12 59.23,72.8 v58.5,73.53
1.8V6  (via drill 0.33)
  Top 0.152: U26.12 90.22,72.8 v89.48,73.53 89.36,73.53 88.37,74.52 86.8,74.52 C21.1 82.19,69.91 82.19,67.61 82.3,67.51 U28.6
  Top 0.178: U28.5 83.7,67.11 83.8,67.21 83.8,67.41 83.69,67.51 U28.6
  Bottom 0.152: U26.12 90.22,72.8 v89.48,73.53
1.8V7  (via drill 0.33)
  Top 0.152: U30.12 121.21,72.8 v120.47,73.53 120.34,73.53 119.36,74.52 117.79,74.52 C24.1 113.18,69.91 113.18,67.61 113.29,67.51 U32.6
  Top 0.178: U32.5 114.68,67.11 114.78,67.21 114.78,67.41 114.68,67.51 U32.6
  Bottom 0.152: U30.12 121.21,72.8 v120.47,73.53
3.3V  (via drill 0.33)
  Bottom 0.152: U3.10
  other vias: 28.57,28.78
  pour Bottom (isolate 0.051): 28.45,29.21 28.7,29.21 29.21,28.7 30.73,28.7 30.73,28.07 28.7,28.07 28.19,28.57 28.19,28.96
  pour Top (isolate 0.051): 28.45,29.21 28.7,29.21 29.21,28.7 30.73,28.7 30.73,28.07 28.7,28.07 28.19,28.57 28.19,28.96
3.3V1  (via drill 0.33)
  Bottom 0.152: U6.10
  other vias: 59.56,28.78
  pour Bottom (isolate 0.051): 59.44,29.21 59.69,29.21 60.2,28.7 61.72,28.7 61.72,28.07 59.69,28.07 59.18,28.57 59.18,28.96
  pour Top (isolate 0.051): 59.44,29.21 59.69,29.21 60.2,28.7 61.72,28.7 61.72,28.07 59.69,28.07 59.18,28.57 59.18,28.96
3.3V2  (via drill 0.33)
  Bottom 0.152: U10.10
  other vias: 90.55,28.78
  pour Bottom (isolate 0.051): 90.42,29.21 90.68,29.21 91.19,28.7 92.71,28.7 92.71,28.07 90.68,28.07 90.17,28.57 90.17,28.96
  pour Top (isolate 0.051): 90.42,29.21 90.68,29.21 91.19,28.7 92.71,28.7 92.71,28.07 90.68,28.07 90.17,28.57 90.17,28.96
3.3V3  (via drill 0.33)
  Bottom 0.152: U14.10
  other vias: 121.54,28.78
  pour Bottom (isolate 0.051): 121.41,29.21 121.67,29.21 122.17,28.7 123.7,28.7 123.7,28.07 121.67,28.07 121.16,28.57 121.16,28.96
  pour Top (isolate 0.051): 121.41,29.21 121.67,29.21 122.17,28.7 123.7,28.7 123.7,28.07 121.67,28.07 121.16,28.57 121.16,28.96
3.3V4  (via drill 0.33)
  Bottom 0.152: U18.10
  other vias: 28.57,73.74
  pour Bottom (isolate 0.051): 28.45,74.17 28.7,74.17 29.21,73.66 30.73,73.66 30.73,73.03 28.7,73.03 28.19,73.53 28.19,73.91
  pour Top (isolate 0.051): 28.45,74.17 28.7,74.17 29.21,73.66 30.73,73.66 30.73,73.03 28.7,73.03 28.19,73.53 28.19,73.91
3.3V5  (via drill 0.33)
  Bottom 0.152: U22.10
  other vias: 59.56,73.74
  pour Bottom (isolate 0.051): 59.44,74.17 59.69,74.17 60.2,73.66 61.72,73.66 61.72,73.03 59.69,73.03 59.18,73.53 59.18,73.91
  pour Top (isolate 0.051): 59.44,74.17 59.69,74.17 60.2,73.66 61.72,73.66 61.72,73.03 59.69,73.03 59.18,73.53 59.18,73.91
3.3V6  (via drill 0.33)
  Bottom 0.152: U26.10
  other vias: 90.55,73.74
  pour Bottom (isolate 0.051): 90.42,74.17 90.68,74.17 91.19,73.66 92.71,73.66 92.71,73.03 90.68,73.03 90.17,73.53 90.17,73.91
  pour Top (isolate 0.051): 90.42,74.17 90.68,74.17 91.19,73.66 92.71,73.66 92.71,73.03 90.68,73.03 90.17,73.53 90.17,73.91
3.3V7  (via drill 0.33)
  Bottom 0.152: U30.10
  other vias: 121.54,73.74
  pour Bottom (isolate 0.051): 121.41,74.17 121.67,74.17 122.17,73.66 123.7,73.66 123.7,73.03 121.67,73.03 121.16,73.53 121.16,73.91
  pour Top (isolate 0.051): 121.41,74.17 121.67,74.17 122.17,73.66 123.7,73.66 123.7,73.03 121.67,73.03 121.16,73.53 121.16,73.91
A1
  Top 0.813: JP1.4 22.48,46.48 23.11,45.85 R1.2 23.91,45.05 24.26,44.7 24.26,42.42 21.61,39.77 20.21,39.77 19.81,39.37 19.81,38.35
  pour Top (isolate 0.305): 19.3,36.96 20.19,36.96 20.19,39.12 19.3,39.12
A2
  Top 0.406: D3.C
  Top 0.813: D3.C D5.A 17.48,40.97 17.47,40.97 17.27,40.77 17.27,38.35 | JP1.3 D3.C
  pour Top (isolate 0.254): 16.76,36.96 17.65,36.96 17.65,38.99 16.76,38.99
A3
  Top 0.406: 50.93,44.97 D8.C
  Top 0.813: D8.C D10.A 48.47,40.97 48.46,40.97 48.26,40.77 48.26,38.35 | JP3.3 50.93,44.97
  pour Top (isolate 0.254): 47.75,36.96 48.64,36.96 48.64,38.99 47.75,38.99
A4
  Top 0.813: JP3.4 53.47,46.48 54.1,45.85 R3.2 54.9,45.05 55.24,44.7 55.24,42.42 52.6,39.77 51.2,39.77 50.8,39.37 50.8,38.35
  pour Top (isolate 0.305): 50.29,36.96 51.18,36.96 51.18,39.12 50.29,39.12
A5
  Top 0.406: 81.92,44.97 D13.C
  Top 0.813: D13.C D15.A 79.46,40.97 79.45,40.97 79.25,40.77 79.25,38.35 | JP5.3 81.92,44.97
  pour Top (isolate 0.254): 78.74,36.96 79.63,36.96 79.63,38.99 78.74,38.99
A6
  Top 0.813: JP5.4 84.45,46.48 85.09,45.85 R5.2 85.89,45.05 86.23,44.7 86.23,42.42 83.58,39.77 82.19,39.77 81.79,39.37 81.79,38.35
  pour Top (isolate 0.305): 81.28,36.96 82.17,36.96 82.17,39.12 81.28,39.12
A7
  Top 0.406: 112.9,44.97 D18.C
  Top 0.813: D18.C D20.A 110.45,40.97 110.44,40.97 110.24,40.77 110.24,38.35 | JP7.3 112.9,44.97
  pour Top (isolate 0.254): 109.73,36.96 110.62,36.96 110.62,38.99 109.73,38.99
A8
  Top 0.813: JP7.4 115.44,46.48 116.08,45.85 R7.2 116.88,45.05 117.22,44.7 117.22,42.42 114.57,39.77 113.18,39.77 112.78,39.37 112.78,38.35
  pour Top (isolate 0.305): 112.27,36.96 113.16,36.96 113.16,39.12 112.27,39.12
A9
  Top 0.406: D23.C
  Top 0.813: D23.C D25.A 17.48,85.93 17.47,85.93 17.27,85.72 17.27,83.31 | JP9.3 D23.C
  pour Top (isolate 0.254): 16.76,81.92 17.65,81.92 17.65,83.95 16.76,83.95
A10
  Top 0.813: JP9.4 22.48,91.44 23.11,90.81 R9.2 23.91,90 24.26,89.66 24.26,87.38 21.61,84.73 20.21,84.73 19.81,84.33 19.81,83.31
  pour Top (isolate 0.305): 19.3,81.92 20.19,81.92 20.19,84.07 19.3,84.07
A11
  Top 0.406: 50.93,89.93 D28.C
  Top 0.813: D28.C D30.A 48.47,85.93 48.46,85.93 48.26,85.72 48.26,83.31 | JP11.3 50.93,89.93
  pour Top (isolate 0.254): 47.75,81.92 48.64,81.92 48.64,83.95 47.75,83.95
A12
  Top 0.813: JP11.4 53.47,91.44 54.1,90.81 R11.2 54.9,90 55.24,89.66 55.24,87.38 52.6,84.73 51.2,84.73 50.8,84.33 50.8,83.31
  pour Top (isolate 0.305): 50.29,81.92 51.18,81.92 51.18,84.07 50.29,84.07
A13
  Top 0.406: 81.92,89.93 D33.C
  Top 0.813: D33.C D35.A 79.46,85.93 79.45,85.93 79.25,85.72 79.25,83.31 | JP13.3 81.92,89.93
  pour Top (isolate 0.254): 78.74,81.92 79.63,81.92 79.63,83.95 78.74,83.95
A14
  Top 0.813: JP13.4 84.45,91.44 85.09,90.81 R13.2 85.89,90 86.23,89.66 86.23,87.38 83.58,84.73 82.19,84.73 81.79,84.33 81.79,83.31
  pour Top (isolate 0.305): 81.28,81.92 82.17,81.92 82.17,84.07 81.28,84.07
A15
  Top 0.406: 112.9,89.93 D38.C
  Top 0.813: D38.C D40.A 110.45,85.93 110.44,85.93 110.24,85.72 110.24,83.31 | JP15.3 112.9,89.93
  pour Top (isolate 0.254): 109.73,81.92 110.62,81.92 110.62,83.95 109.73,83.95
A16
  Top 0.813: JP15.4 115.44,91.44 116.08,90.81 R15.2 116.88,90 117.22,89.66 117.22,87.38 114.57,84.73 113.18,84.73 112.78,84.33 112.78,83.31
  pour Top (isolate 0.305): 112.27,81.92 113.16,81.92 113.16,84.07 112.27,84.07
B1
  Top 0.254: 13.34,38.73 13.2,38.87
  Top 0.813: JP1.1 14.86,46.48 14.35,45.97 R2.2 13.55,45.05 13.21,44.7 13.21,42.42 13.2,38.87
  pour Top (isolate 0.305): 12.83,36.96 13.72,36.96 13.72,38.99 12.83,38.99
B2
  Top 0.406: 17.4,45.07 D2.C
  Top 0.813: D2.C D4.A 17.51,42.53 15.93,40.95 15.93,38.54 15.88,38.48 | JP1.2 17.4,45.07
  pour Top (isolate 0.254): 15.37,36.96 16.26,36.96 16.26,38.99 15.37,38.99
B3
  Top 0.254: 44.32,38.73 44.19,38.87
  Top 0.813: JP3.1 45.85,46.48 45.34,45.97 R4.2 44.54,45.05 44.2,44.7 44.2,42.42 44.19,38.87
  pour Top (isolate 0.305): 43.81,36.96 44.7,36.96 44.7,38.99 43.81,38.99
B4
  Top 0.406: 48.39,45.07 D7.C
  Top 0.813: D7.C D9.A 48.5,42.53 46.92,40.95 46.92,38.54 46.86,38.48 | JP3.2 48.39,45.07
  pour Top (isolate 0.254): 46.35,36.96 47.24,36.96 47.24,38.99 46.35,38.99
B5
  Top 0.254: 75.31,38.73 75.18,38.87
  Top 0.813: JP5.1 76.83,46.48 76.33,45.97 R6.2 75.53,45.05 75.18,44.7 75.18,42.42 75.18,38.87
  pour Top (isolate 0.305): 74.8,36.96 75.69,36.96 75.69,38.99 74.8,38.99
B6
  Top 0.406: 79.38,45.07 D12.C
  Top 0.813: D12.C D14.A 79.49,42.53 77.91,40.95 77.91,38.54 77.85,38.48 | JP5.2 79.38,45.07
  pour Top (isolate 0.254): 77.34,36.96 78.23,36.96 78.23,38.99 77.34,38.99
B7
  Top 0.254: 106.3,38.73 106.17,38.87
  Top 0.813: JP7.1 107.82,46.48 107.31,45.97 R8.2 106.51,45.05 106.17,44.7 106.17,42.42 106.17,38.87
  pour Top (isolate 0.305): 105.79,36.96 106.68,36.96 106.68,38.99 105.79,38.99
B8
  Top 0.406: 110.36,45.07 D17.C
  Top 0.813: D17.C D19.A 110.48,42.53 108.89,40.95 108.89,38.54 108.84,38.48 | JP7.2 110.36,45.07
  pour Top (isolate 0.254): 108.33,36.96 109.22,36.96 109.22,38.99 108.33,38.99
B9
  Top 0.254: 13.34,83.69 13.2,83.82
  Top 0.813: JP9.1 14.86,91.44 14.35,90.93 R10.2 13.55,90 13.21,89.66 13.21,87.38 13.2,83.82
  pour Top (isolate 0.305): 12.83,81.92 13.72,81.92 13.72,83.95 12.83,83.95
B10
  Top 0.406: 17.4,90.03 D22.C
  Top 0.813: D22.C D24.A 17.51,87.49 15.93,85.91 15.93,83.5 15.88,83.44 | JP9.2 17.4,90.03
  pour Top (isolate 0.254): 15.37,81.92 16.26,81.92 16.26,83.95 15.37,83.95
B11
  Top 0.254: 44.32,83.69 44.19,83.82
  Top 0.813: JP11.1 45.85,91.44 45.34,90.93 R12.2 44.54,90 44.2,89.66 44.2,87.38 44.19,83.82
  pour Top (isolate 0.305): 43.81,81.92 44.7,81.92 44.7,83.95 43.81,83.95
B12
  Top 0.406: 48.39,90.03 D27.C
  Top 0.813: D27.C D29.A 48.5,87.49 46.92,85.91 46.92,83.5 46.86,83.44 | JP11.2 48.39,90.03
  pour Top (isolate 0.254): 46.35,81.92 47.24,81.92 47.24,83.95 46.35,83.95
B13
  Top 0.254: 75.31,83.69 75.18,83.82
  Top 0.813: JP13.1 76.83,91.44 76.33,90.93 R14.2 75.53,90 75.18,89.66 75.18,87.38 75.18,83.82
  pour Top (isolate 0.305): 74.8,81.92 75.69,81.92 75.69,83.95 74.8,83.95
B14
  Top 0.406: 79.38,90.03 D32.C
  Top 0.813: D32.C D34.A 79.49,87.49 77.91,85.91 77.91,83.5 77.85,83.44 | JP13.2 79.38,90.03
  pour Top (isolate 0.254): 77.34,81.92 78.23,81.92 78.23,83.95 77.34,83.95
B15
  Top 0.254: 106.3,83.69 106.17,83.82
  Top 0.813: JP15.1 107.82,91.44 107.31,90.93 R16.2 106.51,90 106.17,89.66 106.17,87.38 106.17,83.82
  pour Top (isolate 0.305): 105.79,81.92 106.68,81.92 106.68,83.95 105.79,83.95
B16
  Top 0.406: 110.36,90.03 D37.C
  Top 0.813: D37.C D39.A 110.48,87.49 108.89,85.91 108.89,83.5 108.84,83.44 | JP15.2 110.36,90.03
  pour Top (isolate 0.254): 108.33,81.92 109.22,81.92 109.22,83.95 108.33,83.95
DCIN  (via drill 0.33)
  Top 0.152: U3.14 27.6,27.44 26.24,28.8 v26.09,28.8
  Bottom 0.152: v26.09,28.8 26.24,28.8 27.6,27.44 U3.14
DCIN1  (via drill 0.33)
  Top 0.152: U6.14 58.59,27.44 57.23,28.8 v57.07,28.8
  Bottom 0.152: v57.07,28.8 57.23,28.8 58.59,27.44 U6.14
DCIN2  (via drill 0.33)
  Top 0.152: U10.14 89.58,27.44 88.21,28.8 v88.06,28.8
  Bottom 0.152: v88.06,28.8 88.21,28.8 89.58,27.44 U10.14
DCIN3  (via drill 0.33)
  Top 0.152: U14.14 120.57,27.44 119.2,28.8 v119.05,28.8
  Bottom 0.152: v119.05,28.8 119.2,28.8 120.57,27.44 U14.14
DCIN4  (via drill 0.33)
  Top 0.152: U18.14 27.6,72.4 26.24,73.76 v26.09,73.76
  Bottom 0.152: v26.09,73.76 26.24,73.76 27.6,72.4 U18.14
DCIN5  (via drill 0.33)
  Top 0.152: U22.14 58.59,72.4 57.23,73.76 v57.07,73.76
  Bottom 0.152: v57.07,73.76 57.23,73.76 58.59,72.4 U22.14
DCIN6  (via drill 0.33)
  Top 0.152: U26.14 89.58,72.4 88.21,73.76 v88.06,73.76
  Bottom 0.152: v88.06,73.76 88.21,73.76 89.58,72.4 U26.14
DCIN7  (via drill 0.33)
  Top 0.152: U30.14 120.57,72.4 119.2,73.76 v119.05,73.76
  Bottom 0.152: v119.05,73.76 119.2,73.76 120.57,72.4 U30.14
FAULT  (via drill 0.33)
  Top 0.152: U3.19 33.6,26.24 33.78,26.42 34.59,26.42 34.9,26.72 35.41,26.72 v36.07,27.38
  Bottom 0.152: v36.07,27.38 35.41,26.72 34.9,26.72 34.59,26.42 33.78,26.42 33.6,26.24 U3.19
FAULT1  (via drill 0.33)
  Top 0.152: U6.19 64.59,26.24 64.77,26.42 65.58,26.42 65.89,26.72 66.4,26.72 v67.06,27.38
  Bottom 0.152: v67.06,27.38 66.4,26.72 65.89,26.72 65.58,26.42 64.77,26.42 64.59,26.24 U6.19
FAULT2  (via drill 0.33)
  Top 0.152: U10.19 95.58,26.24 95.76,26.42 96.57,26.42 96.88,26.72 97.38,26.72 v98.04,27.38
  Bottom 0.152: v98.04,27.38 97.38,26.72 96.88,26.72 96.57,26.42 95.76,26.42 95.58,26.24 U10.19
FAULT3  (via drill 0.33)
  Top 0.152: U14.19 126.57,26.24 126.75,26.42 127.56,26.42 127.86,26.72 128.37,26.72 v129.03,27.38
  Bottom 0.152: v129.03,27.38 128.37,26.72 127.86,26.72 127.56,26.42 126.75,26.42 126.57,26.24 U14.19
FAULT4  (via drill 0.33)
  Top 0.152: U18.19 33.6,71.2 33.78,71.37 34.59,71.37 34.9,71.68 35.41,71.68 v36.07,72.34
  Bottom 0.152: v36.07,72.34 35.41,71.68 34.9,71.68 34.59,71.37 33.78,71.37 33.6,71.2 U18.19
FAULT5  (via drill 0.33)
  Top 0.152: U22.19 64.59,71.2 64.77,71.37 65.58,71.37 65.89,71.68 66.4,71.68 v67.06,72.34
  Bottom 0.152: v67.06,72.34 66.4,71.68 65.89,71.68 65.58,71.37 64.77,71.37 64.59,71.2 U22.19
FAULT6  (via drill 0.33)
  Top 0.152: U26.19 95.58,71.2 95.76,71.37 96.57,71.37 96.88,71.68 97.38,71.68 v98.04,72.34
  Bottom 0.152: v98.04,72.34 97.38,71.68 96.88,71.68 96.57,71.37 95.76,71.37 95.58,71.2 U26.19
FAULT7  (via drill 0.33)
  Top 0.152: U30.19 126.57,71.2 126.75,71.37 127.56,71.37 127.86,71.68 128.37,71.68 v129.03,72.34
  Bottom 0.152: v129.03,72.34 128.37,71.68 127.86,71.68 127.56,71.37 126.75,71.37 126.57,71.2 U30.19
FW_RCVR  (via drill 0.33)
  Top 0.152: v33.35,15.16 33.76,15.57 33.76,16.1 33.62,16.24 U3.69
  Bottom 0.152: U3.69 33.62,16.24 33.76,16.1 33.76,15.57 v33.35,15.16
FW_RCVR1  (via drill 0.33)
  Top 0.152: v64.34,15.16 64.75,15.57 64.75,16.1 64.61,16.24 U6.69
  Bottom 0.152: U6.69 64.61,16.24 64.75,16.1 64.75,15.57 v64.34,15.16
FW_RCVR2  (via drill 0.33)
  Top 0.152: v95.33,15.16 95.73,15.57 95.73,16.1 95.6,16.24 U10.69
  Bottom 0.152: U10.69 95.6,16.24 95.73,16.1 95.73,15.57 v95.33,15.16
FW_RCVR3  (via drill 0.33)
  Top 0.152: v126.31,15.16 126.72,15.57 126.72,16.1 126.59,16.24 U14.69
  Bottom 0.152: U14.69 126.59,16.24 126.72,16.1 126.72,15.57 v126.31,15.16
FW_RCVR4  (via drill 0.33)
  Top 0.152: v33.35,60.12 33.76,60.53 33.76,61.06 33.62,61.2 U18.69
  Bottom 0.152: U18.69 33.62,61.2 33.76,61.06 33.76,60.53 v33.35,60.12
FW_RCVR5  (via drill 0.33)
  Top 0.152: v64.34,60.12 64.75,60.53 64.75,61.06 64.61,61.2 U22.69
  Bottom 0.152: U22.69 64.61,61.2 64.75,61.06 64.75,60.53 v64.34,60.12
FW_RCVR6  (via drill 0.33)
  Top 0.152: v95.33,60.12 95.73,60.53 95.73,61.06 95.6,61.2 U26.69
  Bottom 0.152: U26.69 95.6,61.2 95.73,61.06 95.73,60.53 v95.33,60.12
FW_RCVR7  (via drill 0.33)
  Top 0.152: v126.31,60.12 126.72,60.53 126.72,61.06 126.59,61.2 U30.69
  Bottom 0.152: U30.69 126.59,61.2 126.72,61.06 126.72,60.53 v126.31,60.12
GND  (via drill 0.33, 0.51)
  other vias: 33.99,27.38 35.1,29.03 16.05,24.99
  pour Bottom (isolate 0.051, rank 6): 37.34,49.53 37.34,8.64 arc-90 35.56,6.86 8.64,6.86 arc-90 6.86,8.64 6.86,49.53 arc-90 8.64,51.31 35.56,51.31 arc-90
  pour Top (isolate 0.051, rank 6): 37.34,8.59 arc-90 35.61,6.86 8.64,6.86 arc-90 6.86,8.64 6.86,49.53 arc-90 8.64,51.31 35.56,51.31 arc-90 37.34,49.53
GND1  (via drill 0.33, 0.51)
  other vias: 64.97,27.38 66.09,29.03 47.04,24.99
  pour Bottom (isolate 0.051, rank 6): 68.33,49.53 68.33,8.64 arc-90 66.55,6.86 39.62,6.86 arc-90 37.85,8.64 37.85,49.53 arc-90 39.62,51.31 66.55,51.31 arc-90
  pour Top (isolate 0.051, rank 6): 68.33,8.59 arc-90 66.6,6.86 39.62,6.86 arc-90 37.85,8.64 37.85,49.53 arc-90 39.62,51.31 66.55,51.31 arc-90 68.33,49.53
GND2  (via drill 0.33, 0.51)